# Altium PCB Mainboard.PcbDoc (part 1 of 2)
Units mm, origin at the board's own origin, x right, y up, seen from the top; angles counter-clockwise.
Board outline 80 x 116 mm, 4 copper layers (Top Layer, GND, VCC, Bottom Layer), stack 1.042 mm thick; 135 components, 105 nets, 477 pads, 1100 vias.
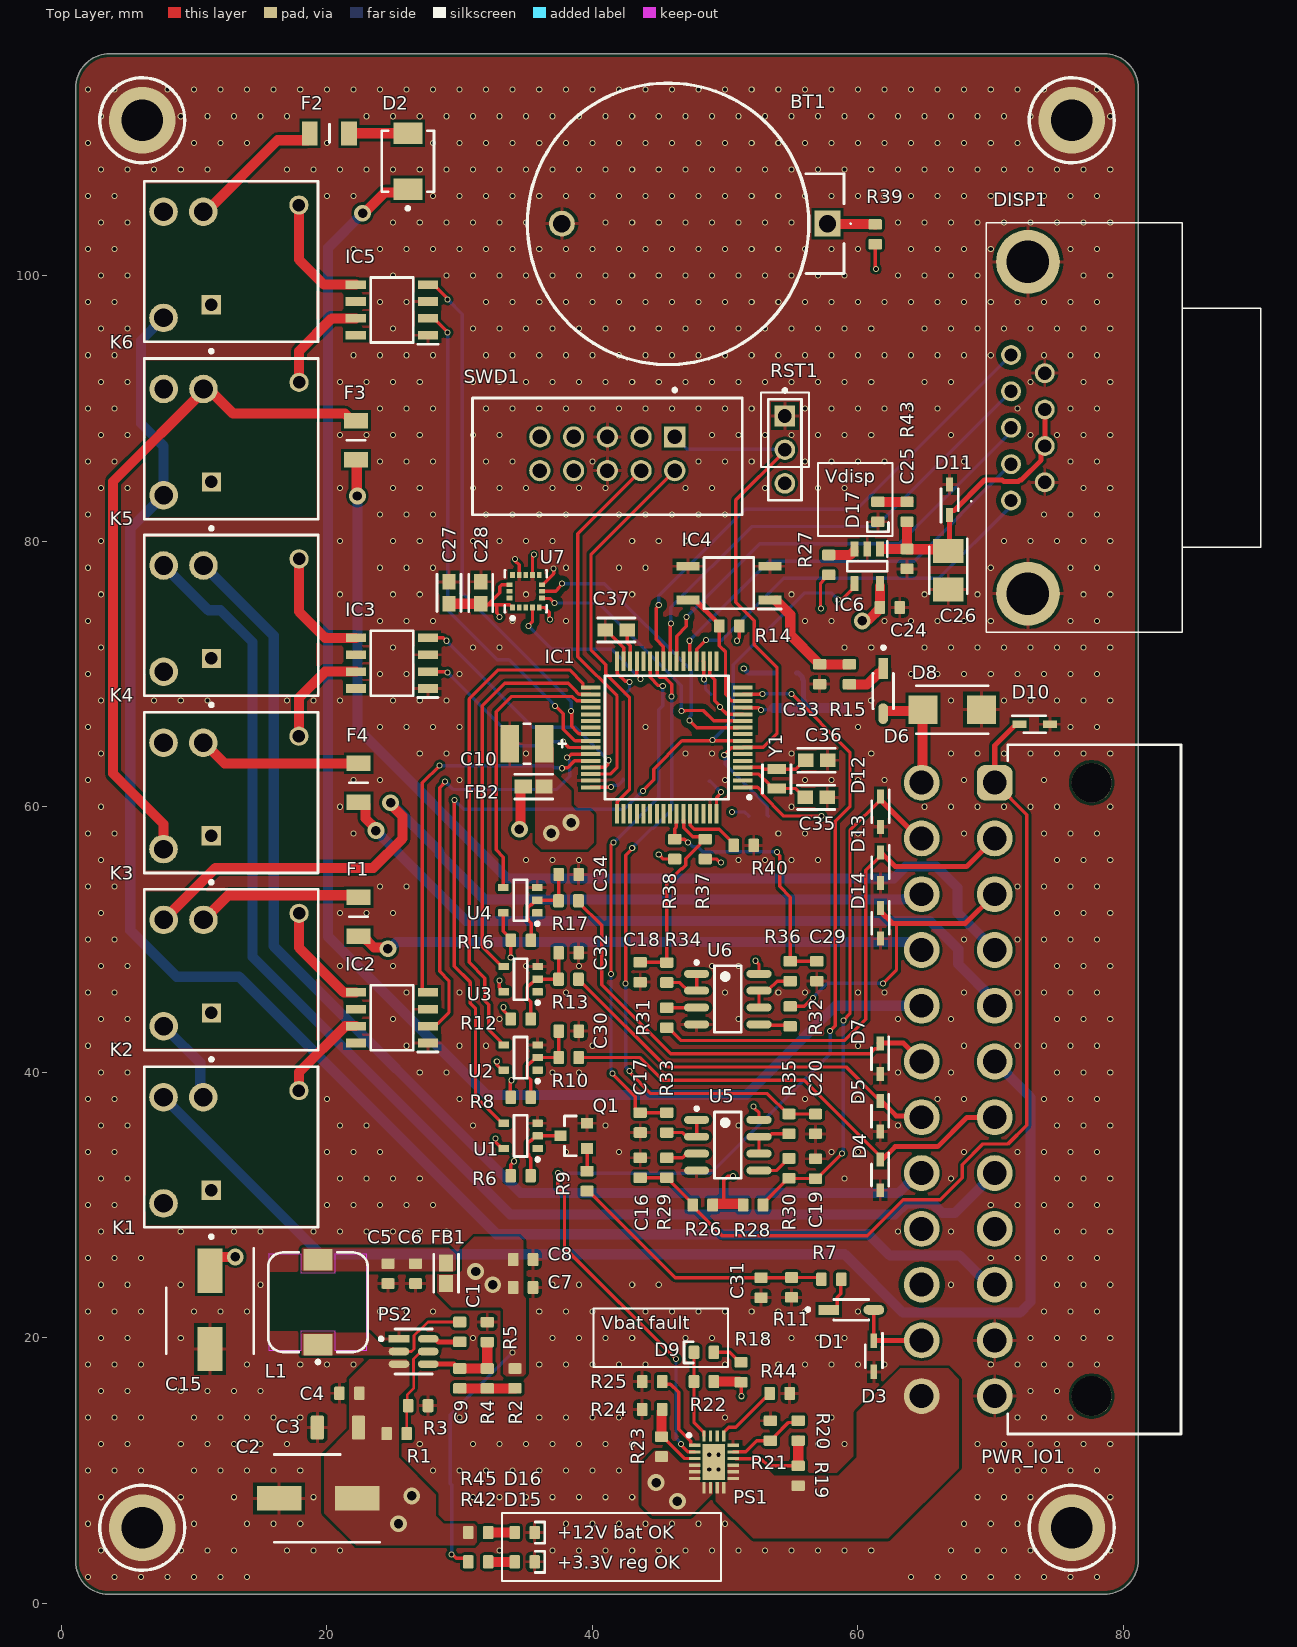
[diagram p0: Top Layer view]
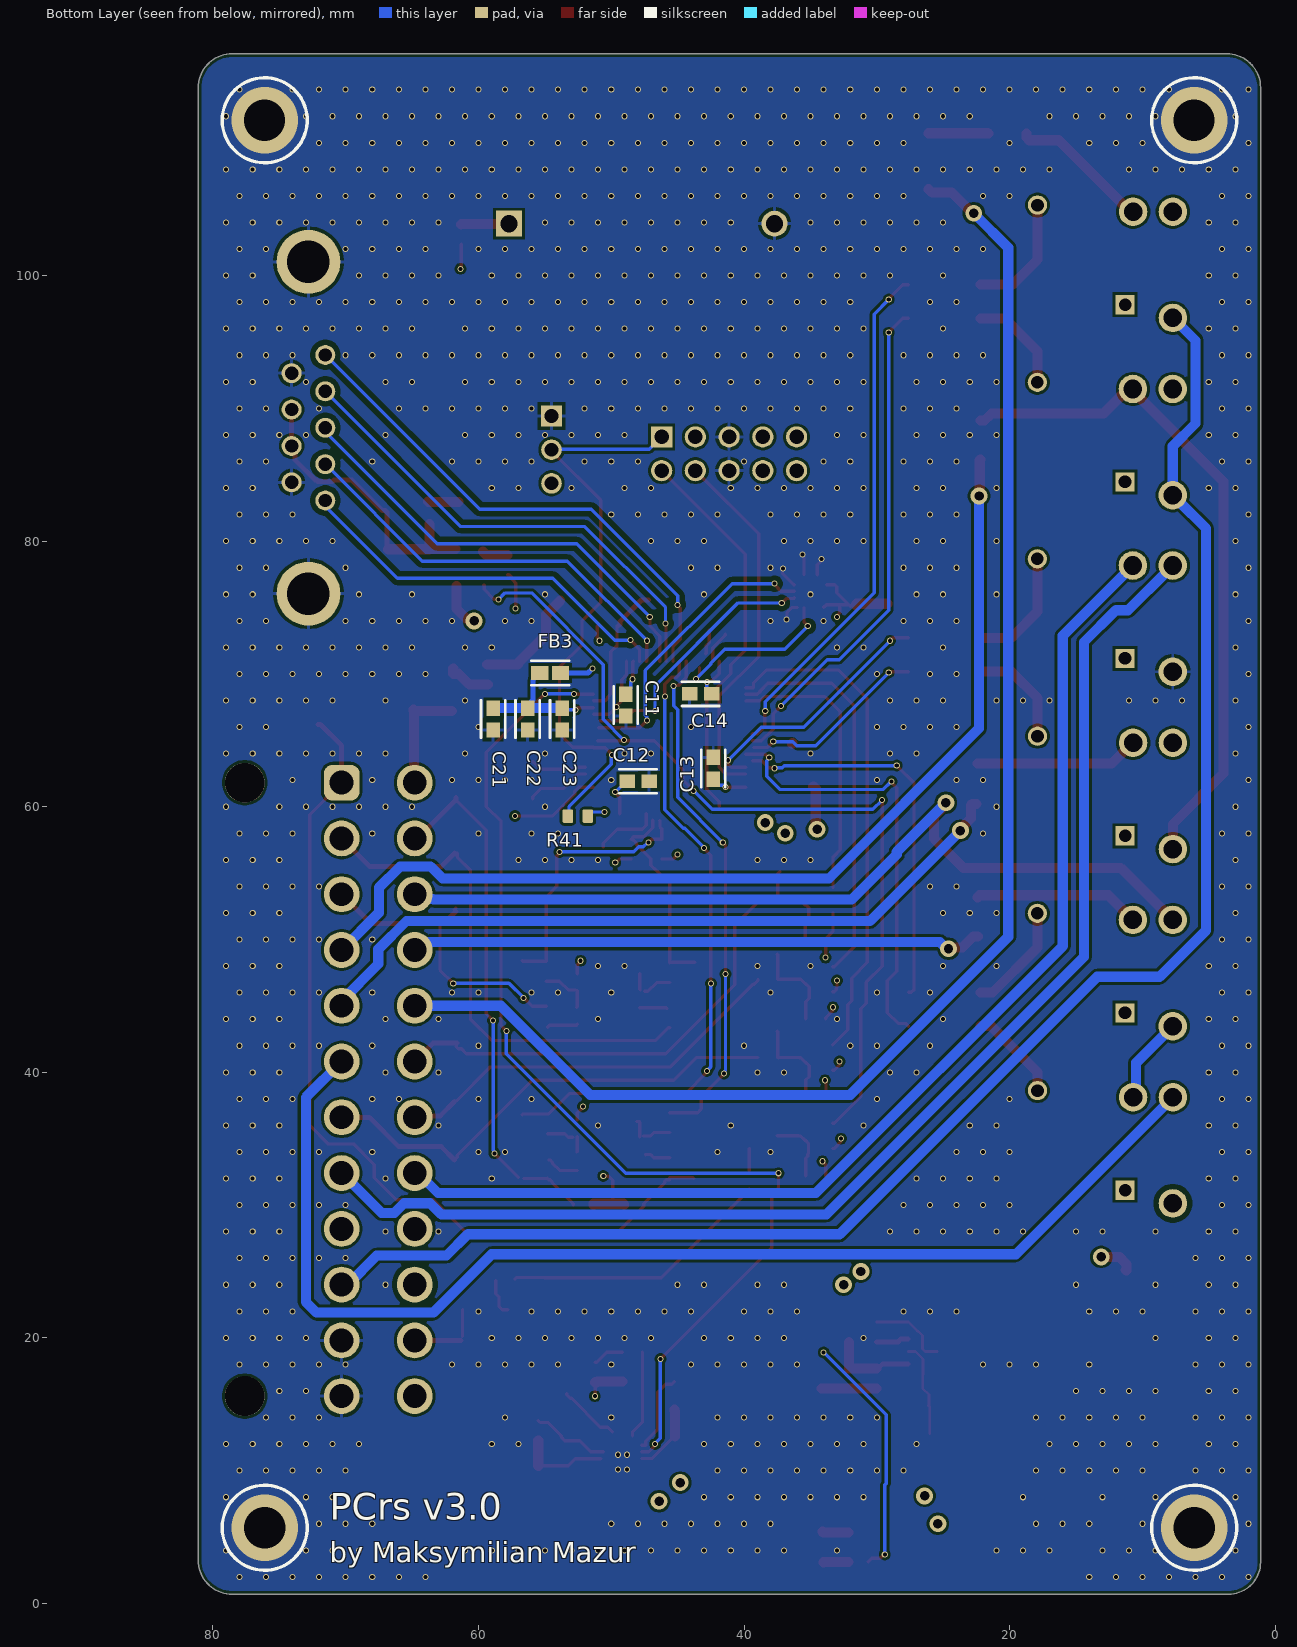
[diagram p1: Bottom Layer view, seen from below]
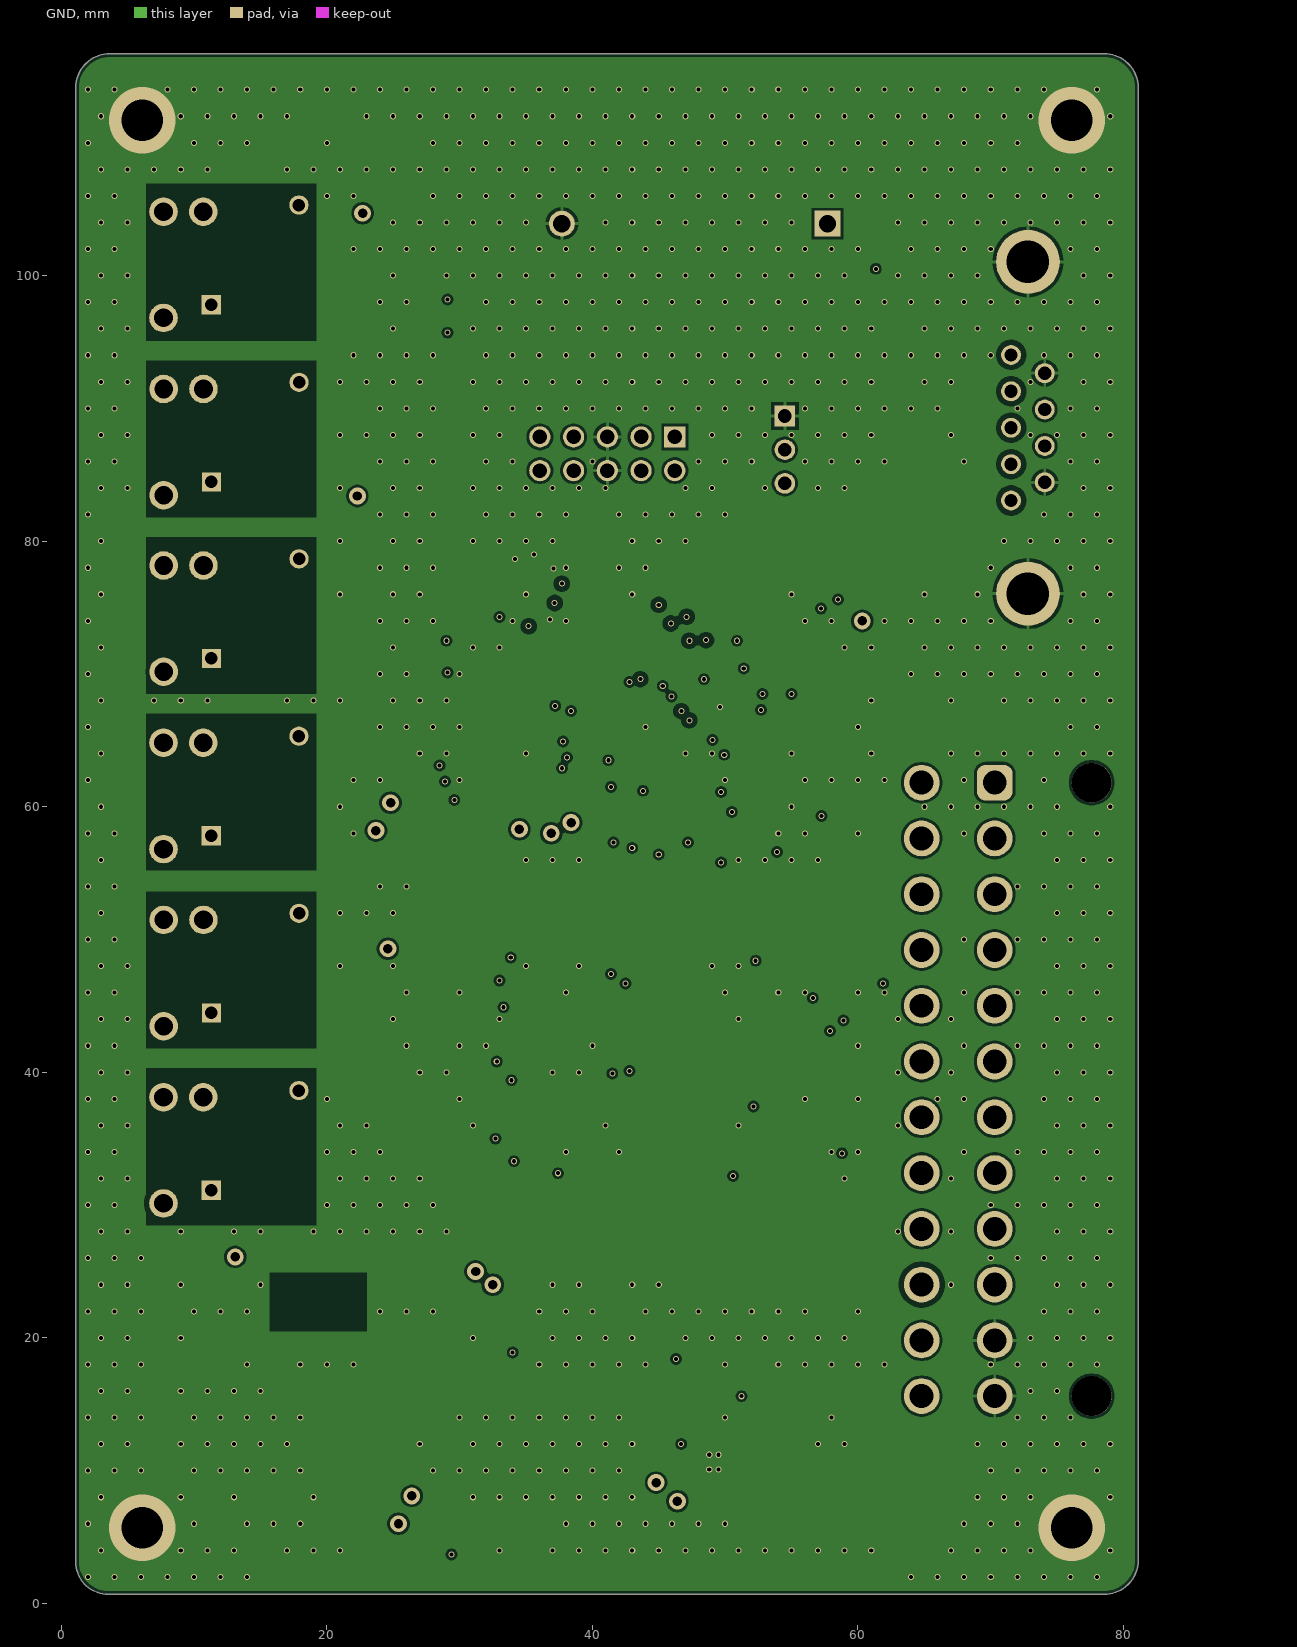
[diagram p2: GND]
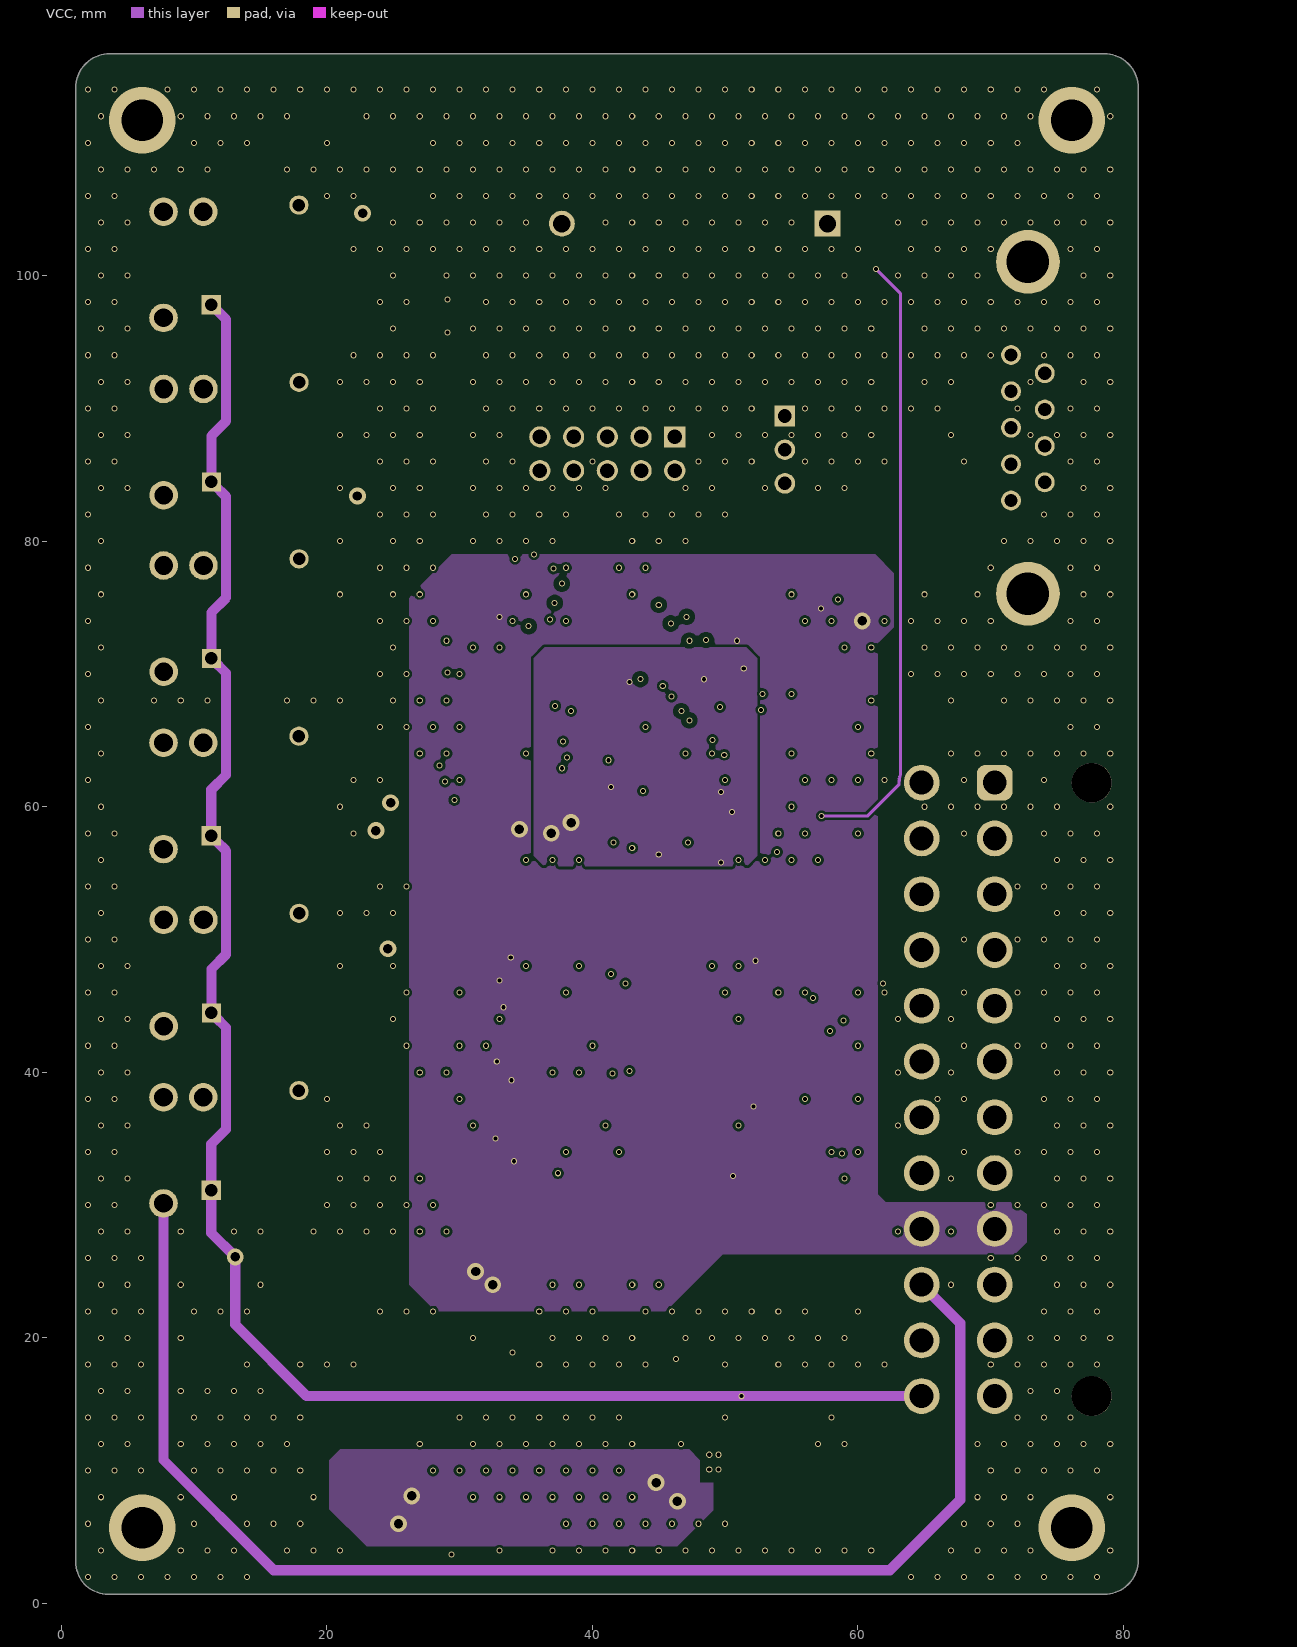
[diagram p3: VCC]
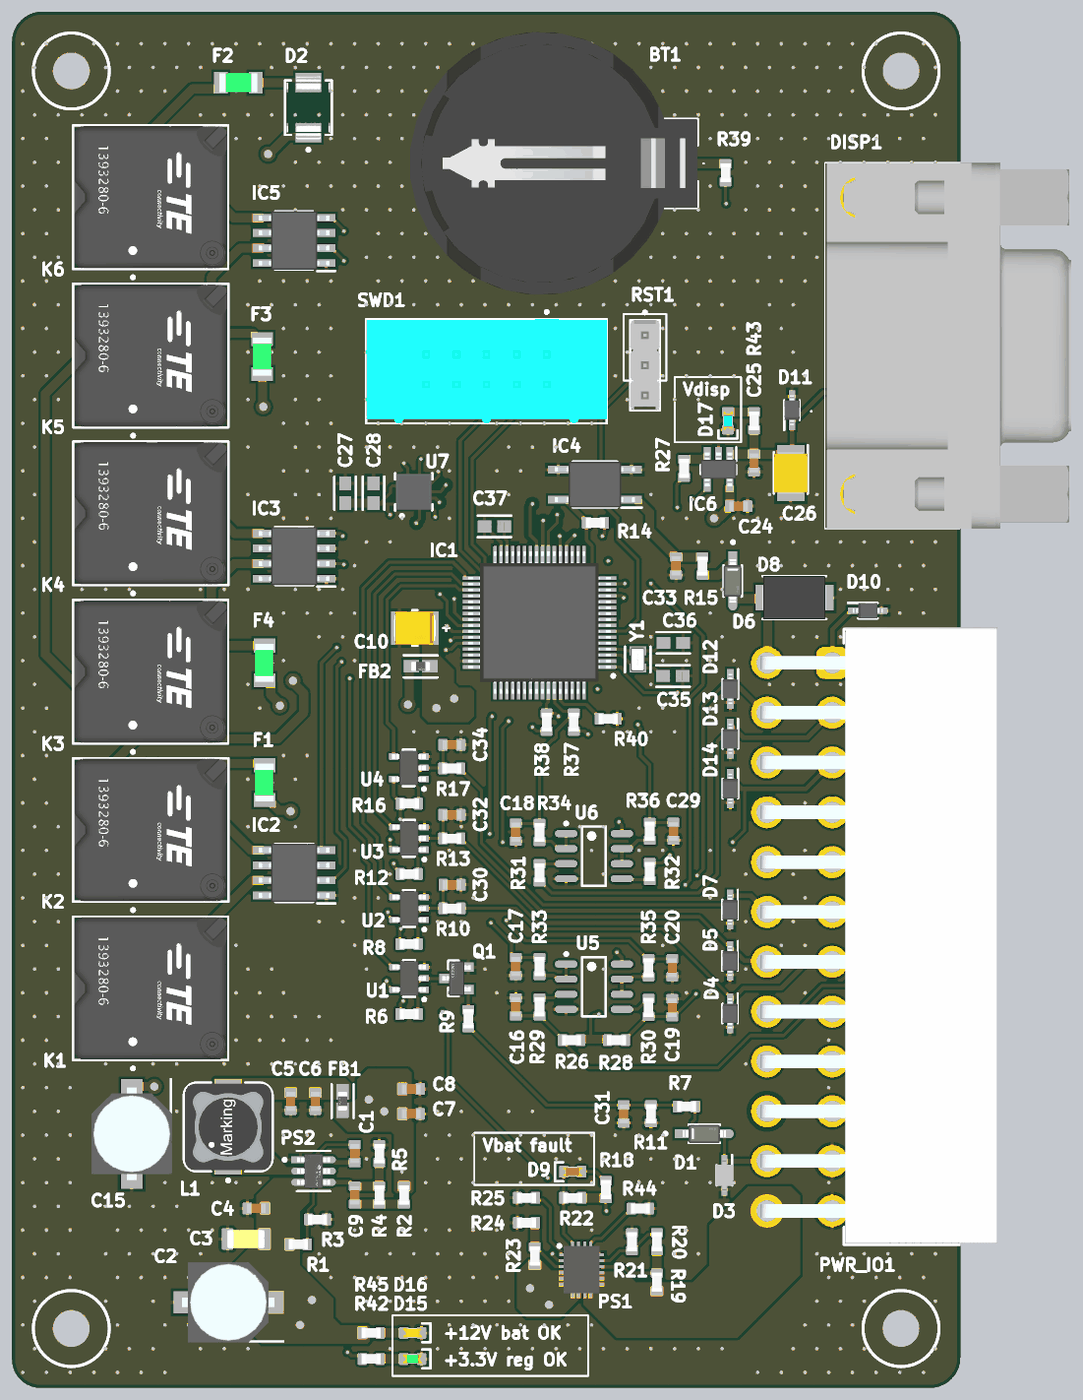
[diagram p5: 3D render of the assembled board from above, using the file's embedded part models]
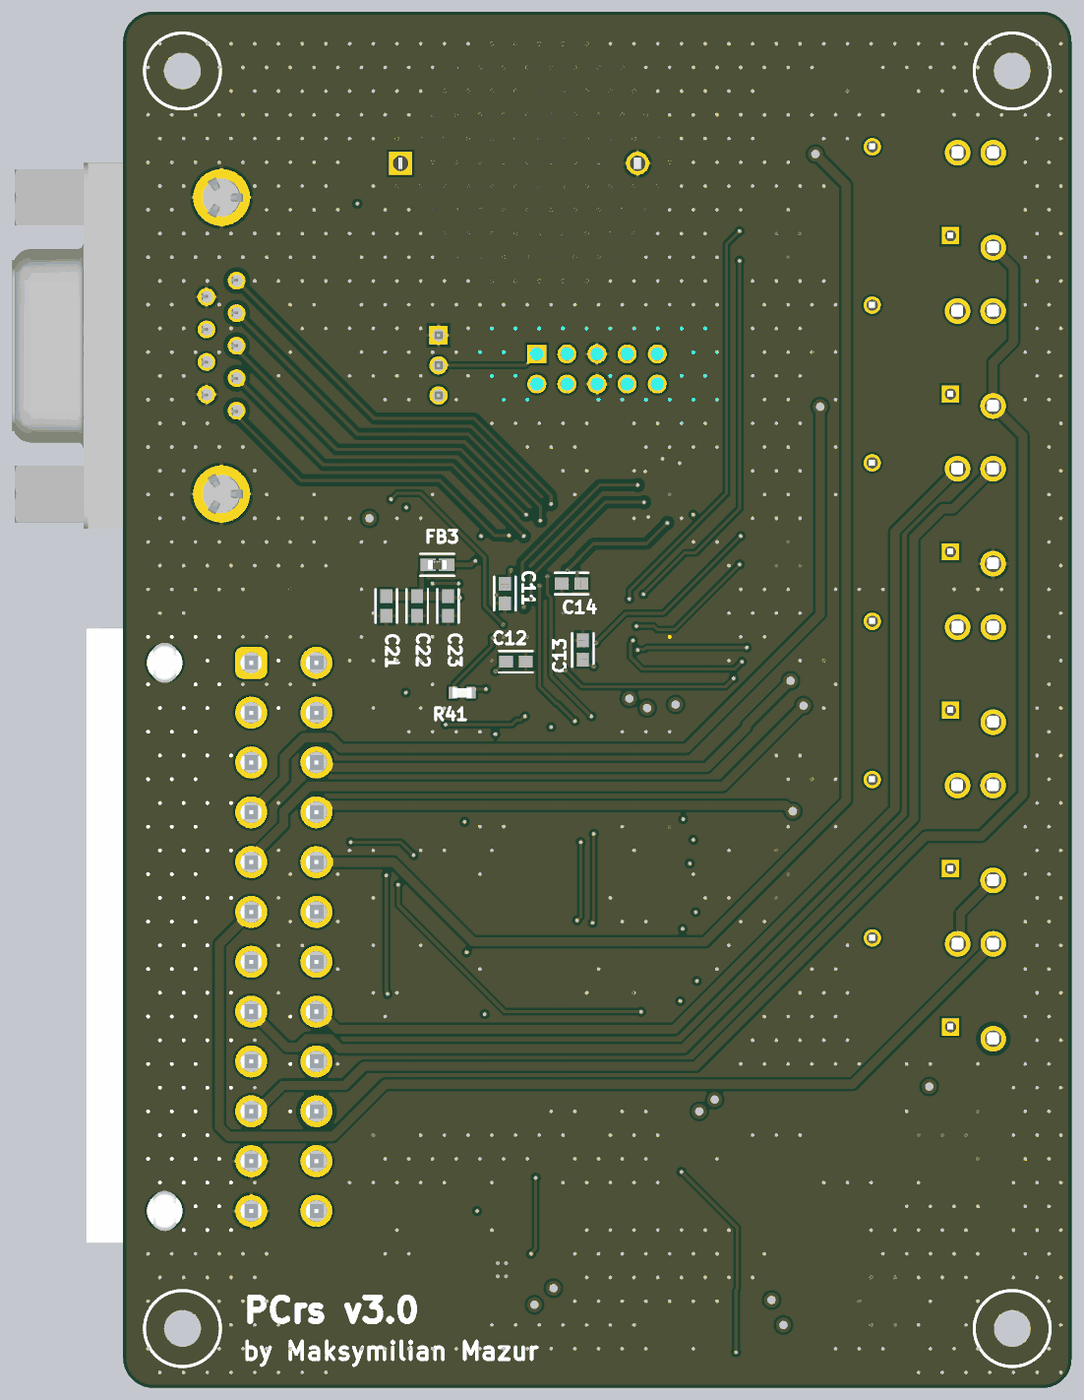
[diagram p6: 3D render of the assembled board from below, using the file's embedded part models]

## Layer stack, top to bottom
Top Solder: solder mask 0.0102, Solder Resist, Dk 3.5
Top Layer: signal copper 0.035
Prepreg Top: prepreg 0.108, PP-006, Dk 4.1
GND: signal copper 0.018
Core: dielectric 0.72, FR-4, Dk 4.8
VCC: signal copper 0.018
Prepreg Bottom: prepreg 0.108, PP-006, Dk 4.1
Bottom Layer: signal copper 0.035
Bottom Solder: solder mask 0.0102, Solder Resist, Dk 3.5

## Board outline
78.56,0.7 ccw(c78.56,3.24) 81.1,3.24 81.1,114.16 ccw(c78.56,114.16) 78.56,116.7 3.64,116.7 ccw(c3.64,114.16) 1.1,114.16 1.1,3.1 ccw(c3.5,3.1) 3.5,0.7 4.5,0.7

## Design rules (kind name [scope] priority, off if disabled: settings)
BoardOutlineClearance BoardOutlineClearance_con [InComponent('DISP1') OR InComponent('PWR_IO1')] p1: gap=0 ignorepadtopadclearanceinfootprint=FALSE
BoardOutlineClearance [All] p2: gap=0.254 ignorepadtopadclearanceinfootprint=FALSE except(0: Arc-SplitContinuation Track-SplitContinuation SMDPad-SplitContinuation THPad-SplitContinuation Via-SplitContinuation Fill-SplitContinuation Poly-SplitContinuation Region-SplitContinuation Text-SplitContinuation)
Clearance Clearance_fp_exceptions [InComponent('U7') OR InComponent('PS1')] p1: gap=0.2 ignorepadtopadclearanceinfootprint=FALSE except(0.1: Arc-SMDPad Track-SMDPad SMDPad-SMDPad)
Clearance Clearance_HF [InNetClass('HF_nets')] p2: gap=0.381 ignorepadtopadclearanceinfootprint=FALSE except(0.2: Track-Track Track-SMDPad SMDPad-SMDPad SMDPad-Fill SMDPad-Region)
Clearance Clearance_standard [All] p3: gap=0.2 ignorepadtopadclearanceinfootprint=FALSE
Clearance [All] p4: gap=0.254 ignorepadtopadclearanceinfootprint=FALSE
HoleSize [All] p1: absolutevalues=TRUE maxlimit=3.2 minlimit=0.2 maxpercent=80.000 minpercent=20.000
MinimumSolderMaskSliver MinimumSolderMaskSliver_fp_exceptions [InComponent('U7') OR InComponent('PS1')] p1: minsoldermaskwidth=0.05
MinimumSolderMaskSliver [All] p2: minsoldermaskwidth=0.1
PolygonConnect PolygonConnect_GND_VIA [InNet('VSS') vs IsVia] p1: connectstyle=Direct reliefconductorwidth=0.254 reliefentries=4 polygonreliefangle="90 Angle" airgapwidth=0.254
PolygonConnect PolygonConnect_GND [InNet('VSS') vs InNet('VSS')] p2: connectstyle=Relief reliefconductorwidth=0.254 reliefentries=4 polygonreliefangle="90 Angle" airgapwidth=0.254
PolygonConnect [All] p3: connectstyle=Direct reliefconductorwidth=0.254 reliefentries=4 polygonreliefangle="90 Angle" airgapwidth=0.254
RoutingVias RoutingVias_PWR [InNetClass('PWR')] p1: holewidth=0.3 width=0.6 viastyle="Through Hole" minholewidth=0.305 minwidth=0.457 maxholewidth=0.711 maxwidth=1.27
RoutingVias [All] p2: holewidth=0.305 width=0.457 viastyle="Through Hole" minholewidth=0.15 minwidth=0.25 maxholewidth=6.3 maxwidth=10
SilkToSilkClearance [All] p1: silktosilkclearance=0.15
SilkToSolderMaskClearance [IsPad] p1: minsilkscreentomaskgap=0.15 clearancetoexposedcopper=TRUE
SolderMaskExpansion [IsVia] p1: expansion=0.102 istentingtop=TRUE
SolderMaskExpansion SolderMaskExpansion_pads [All] p2: expansion=0.05 istentingtop=FALSE
SupplyNets "Schematic Supply Nets_6" [InNet('Vbat')] p1: voltage=0.000
SupplyNets "Schematic Supply Nets_5" [InNet('5V')] p2: voltage=0.000
SupplyNets "Schematic Supply Nets_4" [InNet('Vin')] p3: voltage=0.000
SupplyNets "Schematic Supply Nets_1" [InNet('USB5V')] p4: voltage=0.000
SupplyNets "Schematic Supply Nets" [InNet('3V3')] p5: voltage=0.000
SupplyNets "Schematic Supply Nets_2" [InNet('GND')] p6: voltage=0.000
Width [All] p1: maxlimit=0.762 minlimit=0.2 preferedwidth=0.381 midlayer1_minwidth=0.254 midlayer2_minwidth=0.254 minimp=50.000000 maximp=50.000000 favimp=50.000000
26 further rules are at their usual default settings.

## Classes and differential pairs
net class HF_nets: ACC_MISO ACC_MOSI ACC_SCK OLED_CS OLED_DC OLED_MOSI OLED_RST OLED_SCK VCC_rect_con
component class MPU: C10 C11 C12 C13 C14 C15 C21 C22 C23 C27 C28 C35 C36 C37 FB2 FB3 IC1 IC2 IC3 IC5 K1 K2 K3 K4 K5 K6 R37 R38 R39 R40 R41 Y1
component class Connectors: BT1 D2 D11 DISP1 F1 F2 F3 F4 RST1 SWD1
component class PowerSupply: C1 C2 C3 C4 C5 C6 C7 C8 C9 C24 C25 C26 D9 D15 D16 D17 FB1 IC6 L1 PS2 R1 R2 R3 R4 R5 R18 R19 R20 R21 R22 R23 R24 R25 R27 R42 R43 R44 R45
component class Buffers: C16 C17 C18 C19 C20 C29 C30 C31 C32 C33 C34 C? D1 D3 D4 D5 D6 D7 D8 D10 D12 D13 D14 IC4 Q1 R6 R7 R8 R9 R10 R11 R12 R13 R14 R15 R16 R17 R26 R28 R29 R30 R31 R32 R33 R34 R35 R36 U1 U2 U3 U4 U5 U6

## Components (designator, comment, footprint, x,y, rotation, side; value= is the part's Value field where it differs from the comment)
BT1 "BH-25F-1" BH25F1 57.7,103.912 r0 top
C1 "100nF" CAP_0603 30.016,20.446 r270 top
C2 "220uF" CAPAE660X810N 19.35,7.912 r180 top
C3 "10uF" CAP_1206 20.835,13.247 r0 top
C4 "1uF" CAP_0603 21.696,15.828 r0 top
C5 "22uF" CAP_0603 24.612,24.843 r90 top
C6 "22uF" CAP_0603 26.684,24.843 r90 top
C7 "22uF" CAP_0603 34.779,23.797 r180 top
C8 "22uF" CAP_0603 34.779,25.896 r180 top
C9 "75pF" CAP_0603 30.013,16.946 r270 top
C10 "100uF" FP-TAJB-MFG 35.076,64.742 r0 top
C11 "100nF" FP-CL10-IPC_A 48.9,67.658 r270 bottom
C12 "100nF" FP-CL10-IPC_A 47.973,61.912 r180 bottom
C13 "100nF" FP-CL10-IPC_A 42.318,62.891 r90 bottom
C14 "100nF" FP-CL10-IPC_A 43.267,68.494 r0 bottom
C15 "220uF" CAPAE660X810N 11.2,22.112 r270 top
C16 "22uF" CAP_0603 43.6,32.812 r90 top
C17 "220nF" CAP_0603 43.6,36.213 r270 top
C18 "220nF" CAP_0603 43.6,47.539 r270 top
C19 "22uF" CAP_0603 56.8,32.739 r90 top
C20 "220nF" CAP_0603 56.8,36.112 r270 top
C21 "10uF" FP-CL10-IPC_A 58.9,66.603 r270 bottom
C22 "1uF" FP-CL10-IPC_A 56.3,66.603 r270 bottom
C23 "100nF" FP-CL10-IPC_A 53.7,66.603 r270 bottom
C24 "1uF" CAP_0603 62.4,75.012 r180 top
C25 "100nF" CAP_0603 63.7,78.662 r90 top
C26 "100uF" CAPPM3528X210N 66.8,77.812 r270 top
C27 "10uF" FP-CL10-IPC_A 29.2,76.112 r90 top
C28 "100nF" FP-CL10-IPC_A 31.6,76.112 r90 top
C29 "220nF" CAP_0603 56.9,47.613 r270 top
C30 "220nF" CAP_0603 38.228,43.101 r0 top
C31 "220nF" CAP_0603 52.7,23.785 r270 top
C32 "220nF" CAP_0603 38.212,49 r0 top
C33 "1nF" CAP_0603 57.115,69.985 r270 top
C34 "220nF" CAP_0603 38.212,54.9 r0 top
C35 "22pF" FP-CL10-IPC_A 56.859,60.7 r180 top
C36 "22pF" FP-CL10-IPC_A 56.886,63.5 r180 top
C37 "2.2uF" FP-CL10-IPC_A 41.8,73.312 r0 top
D1 "1N5819HW-7-F" FP-SOD123-IPC_A 59.5,22.113 r0 top
D2 "STTH4R02U" FP-SMB-MFG 26.101,108.612 r90 top
D3 "STS321150U332" SOD2613X100N 61.2,18.612 r270 top
D4 "SD05.TCT" SOD2513X110N 61.675,32.267 r270 top
D5 "SD05.TCT" SOD2513X110N 61.675,36.685 r270 top
D6 "1N5819HW-7-F" FP-SOD123-IPC_A 61.9,68.712 r270 top
D7 "SD05.TCT" SOD2513X110N 61.675,41.012 r270 top
D8 "P6SMB15CA" DIONM5436X261N 67.1,67.312 r180 top
D9 "OSR50603C1E-VV" LED_0603_RED 48.4,18.912 r0 top
D10 "SD05.TCT" SOD2513X110N 73.3,66.212 r0 top
D11 "SD05.TCT" SOD2513X110N 66.9,83.112 r90 top
D12 "SD05.TCT" SOD2513X110N 61.7,59.613 r270 top
D13 "SD05.TCT" SOD2513X110N 61.7,55.413 r270 top
D14 "SD05.TCT" SOD2513X110N 61.7,51.212 r270 top
D15 "OSG50603C1E" LED_0603_GREEN 34.9,3.136 r180 top
D16 "OSY50603C1E-VV" LED_0603_YELLOW 34.9,5.336 r180 top
D17 "OSB50603C1E" LED_0603_BLUE 61.5,82.212 r90 top
DISP1 "L77SDE09S1ACH4F" L77SDE09S1ACH4F 71.53,83.062 r90 top
F1 "0685T5000-01" FUSC3216X83N 22.4,51.712 r90 top
F2 "0685T3000-01" FUSC3216X83N 20.2,110.712 r180 top
F3 "0685T5000-01" FUSC3216X83N 22.2,87.612 r270 top
F4 "0685T5000-01" FUSC3216X83N 22.4,61.798 r270 top
FB1 "test" FP-BLM18-0_15-t0_8-IPC_A 28.989,24.866 r270 top
FB2 "3V3_VDD_FB" FP-BLM18-0_15-t0_8-IPC_A 35.576,61.512 r0 top
FB3 "3V3_VDDA_FB" FP-BLM18-0_15-t0_8-IPC_A 54.6,70.073 r0 bottom
IC1 "STM32F446RET6" QFP50P1200X1200X160-64N 45.6,65.212 r180 top
IC2 "ZXMS6004DN8-13" SOIC127P600X175-8N 24.901,44.112 r180 top
IC3 "ZXMS6004DN8-13" SOIC127P600X175-8N 24.901,70.812 r180 top
IC4 "LTV-356T" SOP254P675X220-4N 50.275,76.842 r180 top
IC5 "ZXMS6004DN8-13" SOIC127P600X175-8N 24.9,97.412 r180 top
IC6 "AP22802BW5-7" SOT95P285X140-5N 60.7,78.113 r270 top
K1 "1393280-6" FP-1393280-6-MFG 12.79,34.374 r90 top
K2 "1393280-6" FP-1393280-6-MFG 12.801,47.724 r90 top
K3 "1393280-6" FP-1393280-6-MFG 12.79,61.062 r90 top
K4 "1393280-6" FP-1393280-6-MFG 12.8,74.419 r90 top
K5 "1393280-6" FP-1393280-6-MFG 12.8,87.712 r90 top
K6 "1393280-6" FP-1393280-6-MFG 12.79,101.062 r90 top
L1 "pwr_inductor" WE-PD_7345 19.332,22.686 r90 top
PS1 "TPS25942ARVCT" QFN50P300X400X80-21N 49.15,10.662 r0 top
PS2 "TPS54202DDCR" FP-DDC0006A-IPC_B 26.538,18.974 r0 top
PWR_IO1 "I/O" 649024227222 77.8,38.712 r90 top
Q1 "2N7002-7-F" FP-SOT23-MFG 38.601,35.212 r180 top
R1 "511k" RES_0603 25.259,12.796 r180 top
R2 "49.9R" RES_0603 34.17,16.946 r90 top
R3 "105k" RES_0603 26.872,14.896 r180 top
R4 "100k" RES_0603 32.084,16.946 r270 top
R5 "22k" RES_0603 32.084,20.433 r90 top
R6 "10k" RES_0603 34.6,32.212 r0 top
R7 "220k" RES_0603 58,24.412 r0 top
R8 "10k" RES_0603 34.6,38.112 r0 top
R9 "100k" RES_0603 39.6,31.813 r270 top
R10 "100k" RES_0603 38.216,41.112 r0 top
R11 "150k" RES_0603 55,23.797 r270 top
R12 "10k" RES_0603 34.6,44.012 r0 top
R13 "100k" RES_0603 38.2,47.012 r0 top
R14 "10k" RES_0603 50.316,73.612 r180 top
R15 "2.7k" RES_0603 59.351,69.973 r270 top
R16 "10k" RES_0603 34.616,49.943 r0 top
R17 "100k" RES_0603 38.2,52.912 r0 top
R18 "100R" RES_0603 51.2,17.413 r270 top
R19 "511k" RES_0603 55.5,9.613 r270 top
R20 "22k" RES_0603 55.501,13.012 r270 top
R21 "33k" RES_0603 53.4,13.013 r270 top
R22 "10k" RES_0603 48.4,16.713 r0 top
R23 "511k" RES_0603 45.201,11.812 r270 top
R24 "46.4k" RES_0603 44.5,14.613 r0 top
R25 "10k" RES_0603 44.5,16.713 r0 top
R26 "10k" RES_0603 48.3,30.012 r0 top
R27 "10k" RES_0603 57.801,78.212 r270 top
R28 "10k" RES_0603 52.1,30.012 r180 top
R29 "100R" RES_0603 45.601,32.812 r270 top
R30 "100R" RES_0603 54.8,32.762 r270 top
R31 "100R" RES_0603 45.6,44.113 r270 top
R32 "100R" RES_0603 54.9,44.212 r90 top
R33 "10k" RES_0603 45.601,36.212 r270 top
R34 "1k" RES_0603 45.601,47.512 r270 top
R35 "10k" RES_0603 54.801,36.112 r270 top
R36 "1k" RES_0603 54.901,47.612 r270 top
R37 "4.7k" RES_0603 48.5,56.812 r90 top
R38 "4.7k" RES_0603 46.2,56.812 r90 top
R39 "100R" RES_0603 61.301,103.112 r270 top
R40 "10k" RES_0603 51.4,57.092 r180 top
R41 "10k" RES_0603 52.515,59.288 r0 bottom
R42 "1k" RES_0603 31.4,3.135 r180 top
R43 "1k" RES_0603 63.701,82.212 r270 top
R44 "150k" RES_0603 54.1,15.813 r0 top
R45 "100R" RES_0603 31.4,5.335 r180 top
RST1 "rst" MOLX-22-28-4033_V 54.5,86.888 r270 top
SWD1 "30310-6002HB" 3M-30310-6002HB-10_V 41.125,86.582 r180 top
U1 "SN74LVC1G17DBVR" DBV0005A_L 34.6,35.212 r180 top
U2 "SN74LVC1G17DBVR" DBV0005A_L 34.601,41.112 r180 top
U3 "SN74LVC1G17DBVR" DBV0005A_L 34.601,47.012 r180 top
U4 "SN74LVC1G17DBVR" DBV0005A_L 34.575,52.962 r180 top
U5 "AD8532ARZ" ADI-R-8_L 50.2,34.512 r0 top
U6 "AD8532ARZ" ADI-R-8_L 50.2,45.512 r0 top
U7 "LIS3DHTR" FP-LGA-16-7983231-MFG 34.988,76.225 r90 top
Y1 "ABS06-32.768KHZ-T" FP-ABS06-MFG 53.888,62.1 r90 top

## Footprints (in the part's own frame and the unit in brackets; to place one, negate y for a bottom-side part, rotate by r counter-clockwise, add the part's x,y. Pads: shape width x height; smd on the part's side, far side on the other; paste and mask are expansions set on the pad)
3M-30310-6002HB-10_V [mm] "CONN, 10-Leads, Body 20.3x8.4mm, Pitch 2.54mm"
  rect 1.6x1.6 hole 1.09: 1(-5.08,-1.27)
  round 1.6 hole 1.09: 2(-5.08,1.27) 3(-2.54,-1.27) 4(-2.54,1.27) 5(0,-1.27) 6(0,1.27) 7(2.54,-1.27) 8(2.54,1.27) 9(5.08,-1.27) 10(5.08,1.27)
  silkscreen extent -10.15,-4.92 10.15,4.58, body extent -10.15,-4.2 10.15,4.61, height 8.89
649024227222 [mm] "4.20mm Male Dual Row Angled Header with Mounting Pegs, 24p"
  rrect50% 2.7x2.7 hole 1.8: 1(23.1,7.5)
  round 2.7 hole 1.8: 2(18.9,7.5) 3(14.7,7.5) 4(10.5,7.5) 5(6.3,7.5) 6(2.1,7.5) 7(-2.1,7.5) 8(-6.3,7.5) 9(-10.5,7.5) 10(-14.7,7.5) 11(-18.9,7.5) 12(-23.1,7.5) 13(23.1,13) 14(18.9,13) 15(14.7,13) 16(10.5,13) 17(6.3,13) 18(2.1,13) 19(-2.1,13) 20(-6.3,13) 21(-10.5,13) 22(-14.7,13) 23(-18.9,13) 24(-23.1,13)
  round 3 hole 3 unplated: MH1(-23.1,0.2) MH2(23.1,0.2)
  silkscreen extent -25.95,-6.53 25.95,6.53, body extent -25.8,-6.4 26.1,13.57, height 11.43
ADI-R-8_L [mm] "SOIC, 8-Leads, Body 4.9x3.9mm, Pitch 1.27mm, IPC High Density"
  oval 1.9x0.6 smd: 1(-2.35,1.905) 2(-2.35,0.635) 3(-2.35,-0.635) 4(-2.35,-1.905) 5(2.35,-1.905) 6(2.35,-0.635) 7(2.35,0.635) 8(2.35,1.905)
  silkscreen extent -2.47,-2.5 1,2.88, body extent -2,-2.5 2,2.5, height 1.75
BH25F1 [mm]
  rect 1.95x1.95 hole 1.3: 1(0,0)
  round 1.95 hole 1.3: 2(-20,0)
  silkscreen extent -1.61,-3.75 1.8,3.75, body extent -23.07,-11.08 1.21,11.08, height 9
CAP_0603 [mm]
  rrect25% 0.8x1 smd: 1(-0.75,0) 2(0.75,0)
  body extent -0.8,-0.4 0.8,0.4, height 0.51
CAP_1206 [mm]
  rrect25% 1x1.8 smd: 1(-1.55,0) 2(1.55,0)
  body extent -1.6,-0.8 1.6,0.8, height 0.94
CAPAE660X810N [mm]
  rect 3.35x1.85 smd: 1(-2.95,0) 2(2.95,0)
  silkscreen extent -4.62,-3.3 3.3,3.3, body extent -3.9,-3.4 3.9,3.4, height 8.1
CAPPM3528X210N [mm]
  rect 1.8x2.3 smd: 1(-1.45,0) 2(1.45,0)
  silkscreen extent -2.35,-1.43 1.75,1.43, body extent -1.75,-1.43 1.75,1.43, height 2.1
DBV0005A_L [mm] "SOT23, 5-Leads, Body 3.05x1.75mm, Pitch 0.95mm, IPC High Density"
  rrect18% 0.8x0.55 smd: 1(-1.275,0.95) 2(-1.275,0) 3(-1.275,-0.95) 4(1.275,-0.95) 5(1.275,0.95)
  silkscreen extent -1.4,-1.55 0.5,1.9, body extent -1.42,-1.46 1.42,1.46, height 1.08
DIONM5436X261N [mm]
  rect 2.2x2.15 smd: 1(-2.2,0) 2(2.2,0)
  silkscreen extent -2.7,-1.81 2.7,1.81, body extent -2.7,-1.81 2.7,1.81, height 2.61
FP-1393280-6-MFG [mm]
  rect 1.45x1.45 hole 0.95 paste-2539.97 mask+0: 1(-3.25,1.49)
  round 1.45 hole 0.95 paste-2539.97 mask+0: 2(4.25,-5.11)
  round 2.15 hole 1.4 paste-2539.97 mask+0: 3(3.75,5.09) 4(-4.25,5.09) 5(3.75,2.09)
  silkscreen extent -6.87,-6.55 6.05,6.55, body extent -6.15,-6.65 6.15,6.65, height 0.25
FP-ABS06-MFG [mm]
  rect 0.75x1.4 smd paste+0 mask+0: 1(-0.725,0) 2(0.725,0)
  silkscreen extent -1.07,-1.07 1.07,1.07, body extent -1.2,-0.8 1.2,0.8, height 0.25
FP-BLM18-0_15-t0_8-IPC_A [mm]
  rect 1.306x1.058 smd paste+0 mask+0: 1(-0.776,0) 2(0.776,0)
  silkscreen extent -1.43,-0.93 1.43,0.93, body extent -1.93,-1.03 1.93,1.03, height 0.25
FP-CL10-IPC_A [mm]
  rect 1.158x1.012 smd paste+0 mask+0: 1(-0.827,0) 2(0.827,0)
  silkscreen extent -1.41,-0.91 1.41,0.91, body extent -0.8,-0.4 0.8,0.4, height 0.9
FP-DDC0006A-IPC_B [mm]
  rect 1.554x0.572 smd paste+0 mask+0: 1(-1.1,0.95)
  rrect100% 1.554x0.572 smd paste+0 mask+0: 2(-1.1,0) 3(-1.1,-0.95) 4(1.1,-0.95) 5(1.1,0) 6(1.1,0.95)
  silkscreen extent -2.57,-1.7 1.4,1.7, body extent -2.13,-1.7 2.13,1.7, height 0.25
FP-LGA-16-7983231-MFG [mm]
  rect 0.45x0.35 smd paste-1000 mask+0: 1(-1.225,1) 2(-1.225,0.5) 3(-1.225,0) 4(-1.225,-0.5) 5(-1.225,-1) 9(1.225,-1) 10(1.225,-0.5) 11(1.225,0) 12(1.225,0.5) 13(1.225,1)
  rect 0.35x0.45 smd paste-1000 mask+0: 6(-0.5,-1.225) 7(0,-1.225) 8(0.5,-1.225) 14(0.5,1.225) 15(0,1.225) 16(-0.5,1.225)
  silkscreen extent -2.15,-1.58 1.58,1.58, body extent -2.07,-2.07 2.07,2.07, height 0.25
FP-SMB-MFG [mm]
  rect 1.62x2.18 smd paste+0 mask+0: 1(-2.11,0) 2(2.11,0)
  silkscreen extent -3.67,-1.97 2.3,1.97, body extent -3.02,-2.07 3.02,2.07, height 0.25
FP-SOD123-IPC_A [mm]
  rect 1.557x0.742 smd paste+0 mask+0: 1(-1.7,0)
  rrect100% 1.557x0.742 smd paste+0 mask+0: 2(1.7,0)
  silkscreen extent -3.39,-0.77 1.33,0.77, body extent -2.98,-1.28 2.98,1.28, height 0.25
FP-SOT23-MFG [mm]
  rect 0.9x0.8 smd paste+0 mask+0: 1(-1,0.95) 2(-1,-0.95) 3(1,0)
  silkscreen extent -0.18,-1.5 0.7,1.5, body extent -1.55,-1.6 1.55,1.6, height 0.25
FP-TAJB-MFG [mm]
  rect 1.4x2.8 smd paste+0 mask+0: 1(-1.3,0) 2(1.3,0)
  silkscreen extent -0.23,-1.5 2.9,1.5, body extent -2.1,-1.6 2.1,1.6, height 0.25
FUSC3216X83N [mm]
  rect 1.17x1.8 smd: 1(-1.47,0) 2(1.47,0)
  silkscreen extent 0,-0.69 0,0.69, body extent -1.6,-0.79 1.6,0.79, height 0.83
L77SDE09S1ACH4F [mm]
  round 1.5 hole 1: 1(0,0) 2(2.74,0) 3(5.48,0) 4(8.22,0) 5(10.96,0) 6(1.37,-2.54) 7(4.11,-2.54) 8(6.85,-2.54) 9(9.59,-2.54)
  round 4.8 hole 3.2: MH1(-7.015,-1.27) MH2(17.975,-1.27)
  silkscreen extent -9.94,-18.79 20.9,3.05, body extent -9.93,-18.92 20.89,1.68, height 13.6
LED_0603_BLUE [mm]
  rrect25% 0.8x1 smd: A(0.75,0) K(-0.75,0)
  silkscreen extent -1.5,-0.8 -0.8,0.8, body extent -0.8,-0.4 0.8,0.4, height 0.6
LED_0603_GREEN [mm]
  rrect25% 0.8x1 smd: A(0.75,0) K(-0.75,0)
  silkscreen extent -1.5,-0.8 -0.8,0.8, body extent -0.8,-0.4 0.8,0.4, height 0.6
LED_0603_RED [mm]
  rrect25% 0.8x1 smd: A(0.75,0) K(-0.75,0)
  silkscreen extent -1.5,-0.8 -0.8,0.8, body extent -0.8,-0.4 0.8,0.4, height 0.6
LED_0603_YELLOW [mm]
  rrect25% 0.8x1 smd: A(0.75,0) K(-0.75,0)
  silkscreen extent -1.5,-0.8 -0.8,0.8, body extent -0.8,-0.4 0.8,0.4, height 0.6
MOLX-22-28-4033_V [mm] "THD, 3-Leads, Body 7.62x2.49mm, Pitch 2.54mm"
  rect 1.55x1.55 hole 1.02: 1(-2.54,0)
  round 1.55 hole 1.02: 2(0,0) 3(2.54,0)
  silkscreen extent -4.58,-1.24 3.81,1.24, body extent -3.81,-1.24 3.81,1.24, height 8.38
QFN50P300X400X80-21N [mm]
  rect 0.85x0.25 smd: 1(-1.45,1.25) 2(-1.45,0.75) 3(-1.45,0.25) 4(-1.45,-0.25) 5(-1.45,-0.75) 6(-1.45,-1.25) 11(1.45,-1.25) 12(1.45,-0.75) 13(1.45,-0.25) 14(1.45,0.25) 15(1.45,0.75) 16(1.45,1.25)
  rect 0.25x0.85 smd: 7(-0.75,-1.95) 8(-0.25,-1.95) 9(0.25,-1.95) 10(0.75,-1.95) 17(0.75,1.95) 18(0.25,1.95) 19(-0.25,1.95) 20(-0.75,1.95)
  rect 1.7x2.7 smd: 21(0,0)
  silkscreen extent -2,1.88 -1.75,2.12, body extent -1.5,-2 1.5,2, height 0.8
QFP50P1200X1200X160-64N [mm]
  rect 1.475x0.3 smd: 1(-5.738,3.75) 2(-5.738,3.25) 3(-5.738,2.75) 4(-5.738,2.25) 5(-5.738,1.75) 6(-5.738,1.25) 7(-5.738,0.75) 8(-5.738,0.25) 9(-5.738,-0.25) 10(-5.738,-0.75) 11(-5.738,-1.25) 12(-5.738,-1.75) 13(-5.738,-2.25) 14(-5.738,-2.75) 15(-5.738,-3.25) 16(-5.738,-3.75) 33(5.738,-3.75) 34(5.738,-3.25) 35(5.738,-2.75) 36(5.738,-2.25) 37(5.738,-1.75) 38(5.738,-1.25) 39(5.738,-0.75) 40(5.738,-0.25) 41(5.738,0.25) 42(5.738,0.75) 43(5.738,1.25) 44(5.738,1.75) 45(5.738,2.25) 46(5.738,2.75) 47(5.738,3.25) 48(5.738,3.75)
  rect 0.3x1.475 smd: 17(-3.75,-5.738) 18(-3.25,-5.738) 19(-2.75,-5.738) 20(-2.25,-5.738) 21(-1.75,-5.738) 22(-1.25,-5.738) 23(-0.75,-5.738) 24(-0.25,-5.738) 25(0.25,-5.738) 26(0.75,-5.738) 27(1.25,-5.738) 28(1.75,-5.738) 29(2.25,-5.738) 30(2.75,-5.738) 31(3.25,-5.738) 32(3.75,-5.738) 49(3.75,5.738) 50(3.25,5.738) 51(2.75,5.738) 52(2.25,5.738) 53(1.75,5.738) 54(1.25,5.738) 55(0.75,5.738) 56(0.25,5.738) 57(-0.25,5.738) 58(-0.75,5.738) 59(-1.25,5.738) 60(-1.75,5.738) 61(-2.25,5.738) 62(-2.75,5.738) 63(-3.25,5.738) 64(-3.75,5.738)
  silkscreen extent -6.35,-4.65 4.65,4.65, body extent -6,-6 6,6, height 1.6
RES_0603 [mm]
  rrect25% 0.8x1 smd: 1(-0.75,0) 2(0.75,0)
  body extent -0.8,-0.43 0.8,0.43, height 0.52
SOD2513X110N [mm]
  rect 1.05x0.55 smd: 1(-1.15,0) 2(1.15,0)
  silkscreen extent -1.68,-0.65 0.82,0.65, body extent -1.25,-0.65 1.25,0.65, height 1.1
SOD2613X100N [mm]
  rect 1.1x0.5 smd: 1(-1.175,0) 2(1.175,0)
  silkscreen extent -1.73,-0.65 0.85,0.65, body extent -1.38,-0.7 1.38,0.7, height 1.11
SOIC127P600X175-8N [mm]
  rect 1.525x0.65 smd: 1(-2.712,1.905) 2(-2.712,0.635) 3(-2.712,-0.635) 4(-2.712,-1.905) 5(2.712,-1.905) 6(2.712,-0.635) 7(2.712,0.635) 8(2.712,1.905)
  silkscreen extent -3.47,-2.45 1.6,2.58, body extent -3,-2.45 3,2.45, height 1.75
SOP254P675X220-4N [mm]
  rect 1.725x0.65 smd: 1(-3.088,1.27) 2(-3.088,-1.27) 3(3.088,-1.27) 4(3.088,1.27)
  silkscreen extent -3.95,-1.92 1.88,1.94, body extent -3.37,-1.92 3.37,1.92, height 2.2
SOT95P285X140-5N [mm]
  rect 1.15x0.6 smd: 1(-1.3,0.95) 2(-1.3,0) 3(-1.3,-0.95) 4(1.3,-0.95) 5(1.3,0.95)
  silkscreen extent -1.88,-1.5 0.38,1.5, body extent -1.43,-1.5 1.43,1.5, height 1.4
WE-PD_7345 [mm] "SMT Shielded Power Inductor, 2-leads, body 7.3x7.3mm"
  rect 1.6x2.2 smd: 1(-3.2,0) 2(3.2,0)
  Top Layer keep-out region: -3.65,-3.65 -3.65,-1.3 -2.2,-1.3 -2.2,1.3 -3.65,1.3 -3.65,3.65 3.65,3.65 3.65,1.3 2.2,1.3 2.2,-1.3 3.65,-1.3 3.65,-3.65
  silkscreen extent -4.62,-3.75 3.75,3.75, body extent -3.65,-3.65 3.65,3.65, height 3.91

## Part data
BT1: "Battery", Manufacturer_Name="Adam Tech", Mouser Part Number=737-BH-25F-1, Arrow Part Number=BH-25F-1, Arrow Price/Stock=https://www.arrow.com/en/products/bh-25f-1/adam-tech?utm_currency=USD&region=europe, Datasheet Link=https://app.adam-tech.com/products/download/data_sheet/196966/bh-25f-1-data-sheet.pdf, Height=9.5mm, Manufacturer_Part_Number=BH-25F-1, Mouser Price/Stock=https://www.mouser.co.uk/ProductDetail/Adam-Tech/BH-25F-1?qs=HoCaDK9Nz5dcCnxRauSciw%3D%3D
C1 C5 C6 C7 C8 C16 C17 C18 C19 C20 C29 C30 C31 C32 C33 C34: library part CAP_0603, "Capacitor SMD 0603 / X7R / LOW ESR"
C2 C15: library part SC1C227M6L07KVR, "Capacitor Polarised / 220uF 16V /  / SC1C227M6L07KVR", Manufacturer_Name=SAMWHA, Datasheet Link=https://octopart.com/datasheet/sc1c227m6l07kvr-samwha-30812620, Height=8.1mm, Manufacturer_Part_Number=SC1C227M6L07KVR
C3: library part CAP_1206, "Capacitor SMD 1206 / 25V"
C4: library part CAP_0603, "Capacitor SMD 0603 / 25V"
C9 C24 C25: library part CAP_0603, "Capacitor SMD 0603"
C10: library part CMP-04424-000366-1, "100uF 6.3V  ±10% 1.7Ω 1210  SMD Tantalum Capacitor / TAJB107K006RNJ", Case Code (Imperial)=1210, Case Code (Metric)=3528, Dielectric Material=Tantalum, ESR (Equivalent Series Resistance)=1.7R, Leakage Current=6.3uA, Max Operating Temperature=125°C, Min Operating Temperature=-55°C, Package Quantity=1, Tolerance=10%, Voltage=6.3V, Capacitance=100uF, Case/Package=1210, Construction=Flat, Depth=2.8mm, Dissipation Factor=10%, Features="General Purpose", Height=1.9mm, Height - Seated (Max)=0.083inch, Lead Free="Lead Free", Length=3.5mm, Mount="Surface Mount", Packaging="Tape and Reel", Polarity=Polar, Radiation Hardening=No, REACH SVHC="No SVHC", RoHS Compliant=Yes, Series=TAJ, Termination=SMD/SMT, Voltage Rating=6.3V, Voltage Rating (DC)=6.3V, Width=2.8mm
C11 C12 C13 C14 C23 C28: library part CMP-13271-000587-1, "Cap Ceramic 100nF 10V X7R ±10% Pad SMD 0603 +125°C T/R", Case/Package=0603, Dielectric=X7R, Max Operating Temperature=125°C, Min Operating Temperature=-55°C, Package Quantity=10000, Tolerance=10%, Voltage=50V, Capacitance=100nF, Depth=0.8mm, Height=0.8mm, Lead Free="Lead Free", Length=1.6mm, Material=Ceramic, Mount="Surface Mount", Packaging="Tape and Reel", Radiation Hardening=No, Thickness=0.035inch, Voltage Rating=50V, Voltage Rating (DC)=50V, Width=0.031inch
C21 C27: library part CMP-13271-000587-1, "Cap Ceramic 10uF 10V X7R ±10% Pad SMD 0603 +125°C T/R", Capacitance=100nF, Case/Package=0603, Dielectric=X7R, Max Operating Temperature=125°C, Min Operating Temperature=-55°C, Package Quantity=10000, Tolerance=10%, Voltage=50V, Depth=0.8mm, Height=0.8mm, Lead Free="Lead Free", Length=1.6mm, Material=Ceramic, Mount="Surface Mount", Packaging="Tape and Reel", Radiation Hardening=No, Thickness=0.035inch, Voltage Rating=50V, Voltage Rating (DC)=50V, Width=0.031inch
C22: library part CMP-13271-000587-1, "Cap Ceramic 1uF 10V X7R ±10% Pad SMD 0603 +125°C T/R", Capacitance=100nF, Case/Package=0603, Dielectric=X7R, Max Operating Temperature=125°C, Min Operating Temperature=-55°C, Package Quantity=10000, Tolerance=10%, Voltage=50V, Depth=0.8mm, Height=0.8mm, Lead Free="Lead Free", Length=1.6mm, Material=Ceramic, Mount="Surface Mount", Packaging="Tape and Reel", Radiation Hardening=No, Thickness=0.035inch, Voltage Rating=50V, Voltage Rating (DC)=50V, Width=0.031inch
C26: library part TAJB107M010RNJ, "Kyocera AVX / TAJB107M010RNJ", Manufacturer_Name="Kyocera AVX", Mouser Part Number=581-TAJB107M010R, Arrow Part Number=TAJB107M010RNJ, Arrow Price/Stock=https://www.arrow.com/en/products/tajb107m010rnj/avx?utm_currency=USD&region=europe, Datasheet Link=http://datasheets.avx.com/TAJ.pdf, Height=2.1mm, Manufacturer_Part_Number=TAJB107M010RNJ, Mouser Price/Stock=https://www.mouser.co.uk/ProductDetail/KYOCERA-AVX/TAJB107M010RNJ?qs=fdqkYiOtZpcLl77pdaUmPA%3D%3D
C35 C36: library part CMP-13271-000587-1, "Cap Ceramic 22pF 25V SMD 0603", Case/Package=0603, Dielectric=X7R, Max Operating Temperature=125°C, Min Operating Temperature=-55°C, Package Quantity=10000, Tolerance=10%, Voltage=50V, Capacitance=22pF, Depth=0.8mm, Height=0.8mm, Lead Free="Lead Free", Length=1.6mm, Material=Ceramic, Mount="Surface Mount", Packaging="Tape and Reel", Radiation Hardening=No, Thickness=0.035inch, Voltage Rating=50V, Voltage Rating (DC)=50V, Width=0.031inch
C37: library part CMP-13271-000587-1, "Cap Ceramic 2.2uF / SMD 0603", Capacitance=22pF, Case/Package=0603, Dielectric=X7R, Max Operating Temperature=125°C, Min Operating Temperature=-55°C, Package Quantity=10000, Tolerance=10%, Voltage=50V, Depth=0.8mm, Height=0.8mm, Lead Free="Lead Free", Length=1.6mm, Material=Ceramic, Mount="Surface Mount", Packaging="Tape and Reel", Radiation Hardening=No, Thickness=0.035inch, Voltage Rating=50V, Voltage Rating (DC)=50V, Width=0.031inch
D1 D6: library part CMP-0303-00003-3, "DIODE SCHOTTKY 40V 1A SOD123", Average Rectified Current=1A, Capacitance=110pF, Case/Package=SOD-123-2, Forward Voltage=450mV, Max Forward Surge Current (Ifsm)=25A, Max Operating Temperature=125°C, Max Power Dissipation=450mW, Max Repetitive Reverse Voltage (Vrrm)=40V, Min Operating Temperature=-65°C, Package Quantity=3000, Peak Reverse Current=50uA, Contact Plating=Tin, Current Rating=1A, Element Configuration=Single, Forward Current=1A, Height=1.25mm, Lead Free="Lead Free", Length=2.85mm, Max Reverse Voltage (DC)=40V, Number of Pins=2, Output Current=1A, Packaging="Tape and Reel", Peak Non-Repetitive Surge Current=25A, Polarity=Standard, Radiation Hardening=No, REACH SVHC="No SVHC", Termination=SMD/SMT, Voltage Rating (DC)=40V, Weight=0.000353oz, Width=1.7mm
D2: library part CMP-12188-000005-1, "DIODE GEN PURP 200V 4A SMB", Forward Current=4A, Manufacturer=STMicroelectronics, Max Junction Temp=+175°C, Max Repetitive Reverse Voltage=200V, Max Surge Forward Current=70A, Package=SMB, Peak Reverse Current=3uA, Temperature="to +175°C", Automotive=No, Category=Diode, ComponentLink2Description=Datasheet, ComponentLink2URL=https://www.st.com/resource/en/datasheet/stth4r02.pdf, Device Class L1="Discrete Semiconductors", Device Class L2=Diodes, Device Class L3="Rectifier Diodes", Digikey Description="DIODE GEN PURP 200V 4A SMB", Height=2.65mm, Lead Free=Yes, Manufacturer Part Number=STTH4R02U, Mouser Description="Rectifiers RECTIFIER", Octopart=https://octopart.com/stth4r02u-stmicroelectronics-324581, RoHS=TRUE, Standoff Height=0.05mm, Temperature Range High=+175°C
D3: library part STS321150U751, "Diode ESD (Uni-directional) /  / SOD-323  / 16V 330pF", Manufacturer_Name=Eaton, Datasheet Link=https://www.eaton.com/content/dam/eaton/products/electronic-components/resources/data-sheet/eaton-sts321xxxuxxx-tvs-diode-esd-suppressor-data-sheet.pdf, Height=1mm, Manufacturer_Part_Number=STS321150U751
D4 D5 D7 D10 D11 D12 D13 D14: "Diode", Manufacturer_Name=SEMTECH, Mouser Part Number=947-SD05.TCT, Arrow Part Number=SD05.TCT, Arrow Price/Stock=https://www.arrow.com/en/products/sd05.tct/semtech?utm_currency=USD&region=nac, Datasheet Link=https://datasheet.datasheetarchive.com/originals/distributors/Datasheets-DGA26/1841681.pdf, Height=1.1mm, Manufacturer_Part_Number=SD05.TCT, Mouser Price/Stock=https://www.mouser.co.uk/ProductDetail/Semtech/SD05.TCT?qs=rBWM4%252BvDhIed78qt1y4o0Q%3D%3D
D8: "TVS Diode (Bi-directional)", Manufacturer_Name=LITTELFUSE, Mouser Part Number=576-P6SMB15CA, Arrow Part Number=P6SMB15CA, Arrow Price/Stock=https://www.arrow.com/en/products/p6smb15ca/littelfuse?region=nac, Datasheet Link=https://www.littelfuse.com/~/media/electronics/datasheets/tvs_diodes/littelfuse_tvs_diode_p6smb_datasheet.pdf.pdf, Height=2.61mm, Manufacturer_Part_Number=P6SMB15CA, Mouser Price/Stock=https://www.mouser.co.uk/ProductDetail/Littelfuse/P6SMB15CA?qs=MLCmBfHNlR44V7NRW6hWSw%3D%3D
D9: library part LED_0603_RED, "LED 0603 RED SMD / Model: OSR50603C1E"
D15: library part LED_0603_GREEN, "LED 0603 GREEN SMD / OSG50603C1E"
D16: library part LED_0603_YELLOW, "LED 0603 YELLOW SMD / OSY50603C1E-VV"
D17: library part LED_0603_BLUE, "LED 0603 BLUE SMD"
DISP1: "Connector", Manufacturer_Name="Amphenol Communications Solutions", Mouser Part Number=523-L77SDE09S1ACH4F, Datasheet Link=https://cdn.amphenol-cs.com/media/wysiwyg/files/drawing/l77sdxxxs1ach4f.pdf, Height=12.93mm, Manufacturer_Part_Number=L77SDE09S1ACH4F, Mouser Price/Stock=https://www.mouser.com/Search/Refine.aspx?Keyword=523-L77SDE09S1ACH4F
F1 F3 F4: library part 0685T3000-01, "Fuse 5A  / 63VAC/63VDC / 1206", Manufacturer_Name=BelFuse, Arrow Part Number=0685T3000-01, Arrow Price/Stock=https://www.arrow.com/en/products/0685t3000-01/bel-group, Datasheet Link=https://www.belfuse.com/resources/datasheets/circuitprotection/ds-cp-c1t-series.pdf, Height=0.83mm, Manufacturer_Part_Number=0685T3000-01
F2: "Fuse 3A  / 63VAC/63VDC / 1206", Manufacturer_Name=BelFuse, Arrow Part Number=0685T3000-01, Arrow Price/Stock=https://www.arrow.com/en/products/0685t3000-01/bel-group, Datasheet Link=https://www.belfuse.com/resources/datasheets/circuitprotection/ds-cp-c1t-series.pdf, Height=0.83mm, Manufacturer_Part_Number=0685T3000-01
FB1: library part CMP-0686-00557-7, "Chip Ferrite Bead, 0603 /  / For testing purpose", Case Code (Imperial)=0603, Case Code (Metric)=1608, Current Rating=2A, DC Resistance (DCR)=50mR, Frequency=100MHz, Max Operating Temperature=125°C, Min Operating Temperature=-55°C, Package Quantity=1, Tolerance=25%, Case/Package=0603, Core Material=Ferrite, DC Current=2A, Depth=0.8mm, Height=0.8mm, Impedance=120R, Lead Free="Lead Free", Length=1.6mm, Material=Steel, Max Current Rating=2A, Max DC Current=2A, Number of Circuits=1, Number of Lines=1, Number of Pins=2, Packaging="Tape and Reel", Radiation Hardening=No, REACH SVHC="No SVHC", RoHS Compliant=Yes, Shielding=Unshielded, Termination=SMD/SMT, Test Frequency=100MHz, Width=0.8mm
FB2 FB3: library part CMP-0686-00557-7, "Chip Ferrite Bead, 0603 / Z = 220, f = 100MHz", Case Code (Imperial)=0603, Case Code (Metric)=1608, Current Rating=2A, DC Resistance (DCR)=50mR, Frequency=100MHz, Max Operating Temperature=125°C, Min Operating Temperature=-55°C, Package Quantity=1, Tolerance=25%, Case/Package=0603, Core Material=Ferrite, DC Current=2A, Depth=0.8mm, Height=0.8mm, Impedance=120R, Lead Free="Lead Free", Length=1.6mm, Material=Steel, Max Current Rating=2A, Max DC Current=2A, Number of Circuits=1, Number of Lines=1, Number of Pins=2, Packaging="Tape and Reel", Radiation Hardening=No, REACH SVHC="No SVHC", RoHS Compliant=Yes, Shielding=Unshielded, Termination=SMD/SMT, Test Frequency=100MHz, Width=0.8mm
IC1: "Integrated Circuit", Manufacturer_Name=STMicroelectronics, Mouser Part Number=511-STM32F446RET6, Arrow Part Number=STM32F446RET6, Arrow Price/Stock=https://www.arrow.com/en/products/stm32f446ret6/stmicroelectronics?utm_currency=USD&region=nac, Datasheet Link=https://datasheet.datasheetarchive.com/originals/distributors/DKDS41/DSANUWW0028583.pdf, Height=1.6mm, Manufacturer_Part_Number=STM32F446RET6, Mouser Price/Stock=https://www.mouser.co.uk/ProductDetail/STMicroelectronics/STM32F446RET6?qs=Ok1pvOkw6%2FqpQsWf8F4wtQ%3D%3D
IC2 IC3 IC5: "Integrated Circuit", Manufacturer_Name="Diodes Incorporated", Mouser Part Number=621-ZXMS6004DN8-13, Arrow Part Number=ZXMS6004DN8-13, Arrow Price/Stock=https://www.arrow.com/en/products/zxms6004dn8-13/diodes-incorporated?region=nac, Datasheet Link=https://www.diodes.com//assets/Datasheets/ZXMS6004DN8.pdf, Height=1.75mm, Manufacturer_Part_Number=ZXMS6004DN8-13, Mouser Price/Stock=https://www.mouser.co.uk/ProductDetail/Diodes-Incorporated/ZXMS6004DN8-13?qs=W66WzN12R3YH%252BpRyFoT8Rg%3D%3D
IC4: "Integrated Circuit", Manufacturer_Name=Lite-On, Mouser Part Number=859-LTV-356T, Arrow Part Number=LTV-356T, Arrow Price/Stock=https://www.arrow.com/en/products/ltv-356t/lite-on-technology?region=nac, Datasheet Link=https://componentsearchengine.com/Datasheets/1/LTV-356T.pdf, Height=2.2mm, Manufacturer_Part_Number=LTV-356T, Mouser Price/Stock=https://www.mouser.co.uk/ProductDetail/LITEON/LTV-356T?qs=30I3lYpOJSWvIikXPmhOGQ%3D%3D
IC6: "Integrated Circuit", Manufacturer_Name="Diodes Incorporated", Mouser Part Number=621-AP22802BW5-7, Arrow Part Number=AP22802BW5-7, Arrow Price/Stock=https://www.arrow.com/en/products/ap22802bw5-7/diodes-incorporated?utm_currency=USD&region=asia, Datasheet Link=https://www.diodes.com//assets/Datasheets/products_inactive_data/AP22802.pdf, Height=1.4mm, Manufacturer_Part_Number=AP22802BW5-7, Mouser Price/Stock=https://www.mouser.co.uk/ProductDetail/Diodes-Incorporated/AP22802BW5-7?qs=4WD8WRWcnWvdREmNWulNnQ%3D%3D
K1 K2 K3 K4 K5 K6: library part CMP-03395-000123-1, "Electromechanical Relay 12VDC 254Ohm 40A SPDT (12.9x12x9.9)mm THT Power Relay", Ambient Temperature Range High=+105°C, Ambient Temperature Range Low=-40°C, Coil Power=567mW, Coil Resistance=254Ω, Coil Voltage=12V, Current Rating=30A, Manufacturer="TE Connectivity", Automotive=No, Category=Relay, Coil Type=Non-Latching, ComponentLink2Description=Datasheet, ComponentLink2URL=https://www.te.com/commerce/DocumentDelivery/DDEController?Action=showdoc&DocId=Data+Sheet%7FV23086-X0000-A001%7F0717%7Fpdf%7FEnglish%7FENG_DS_V23086-X0000-A001_0717.pdf%7F1393280-6, Device Class L1=Electromechanical, Device Class L2=Relays, Device Class L3="Power Relays", Footprint Url=https://www.te.com/commerce/DocumentDelivery/DDEController?Action=showdoc&DocId=Customer+Drawing%7FV23086-C1001-A403%7FE%7Fpdf%7FEnglish%7FENG_CD_V23086-C1001-A403_E.pdf%7F1393280-6, Height=10.1mm, Lead Free=Yes, Manufacturer Part Number=1393280-6, Number Of Contacts=1, Octopart=https://octopart.com/1393280-6-te+connectivity-45289632, Package=1393280-6, RoHS=TRUE, Standoff Height=0.3mm, Throw Configuration=SPDT
L1: library part CMP-0227-00155-2, "15uF, 2.7A  HPI0630-150", Ambient Temperature Range High=85°C, Ambient Temperature Range Low=-40°C, Current Rating=2.7A, DC Resistance (DCR)=110mΩ, Inductance=15µH, Max Operating Temperature=125°C, Self Resonant Frequency=9.5MHz, Tolerance=20%, Depth=7.3mm, Height=4.5mm, Length=7.3mm, Max DC Current=2.7A, Min Operating Temperature=-40°C, NexarPartId=31136509, Number of Pins=2, Packaging="Tape & Reel", RoHS=Compliant, Shielding=Shielded, Width=7.3mm
PS1: "Power Supply", Manufacturer_Name="Texas Instruments", Mouser Part Number=595-TPS25942ARVCT, Arrow Part Number=TPS25942ARVCT, Arrow Price/Stock=https://www.arrow.com/en/products/tps25942arvct/texas-instruments?utm_currency=USD&region=nac, Datasheet Link=https://www.arrow.com/en/products/tps25942arvct/texas-instruments, Height=0.8mm, Manufacturer_Part_Number=TPS25942ARVCT, Mouser Price/Stock=https://www.mouser.co.uk/ProductDetail/Texas-Instruments/TPS25942ARVCT?qs=1MXlzafEN38%2FhNIOFl0fzQ%3D%3D
PS2: library part CMP-04918-000439-1, "IC REG BUCK ADJ 2A TSOT23-6", Case/Package=SOT-23-6, Max Input Voltage=28V, Max Operating Temperature=125°C, Min Input Voltage=4.5V, Min Operating Temperature=-40°C, Min Output Voltage=596mV, Output Current=2A, Quiescent Current=40uA, Switching Frequency=500kHz, ComponentLink1Description=datasheet, ComponentLink1URL=https://www.ti.com/lit/ds/symlink/tps54202.pdf, Lead Free="Lead Free", Max Output Voltage=28V, Mount="Surface Mount", Number of Outputs=1, Output Configuration=Positive, Output Type=Adjustable, Packaging="Tape and Reel", RoHS Compliant=Yes, Synchronous Rectifier=Yes
PWR_IO1: library part CMP-1502-00539-2, Color=White, Contact Resistance=10mΩ, Current Rating=6A, Insulation Resistance=1GΩ, Max Operating Temperature=105°C, Min Operating Temperature=-40°C, Operating Supply Voltage=600V, Connector Type="Male Pin, Socket", Contact Material=Copper, Contact Plating=Tin, Fastening Type=Ramp, Gender=Male, Height=12.8mm, Lead Pitch=4.2mm, Length=51.6mm, Mount="Through Hole", NexarPartId=23024662, Number Of Contacts=24, Number of Pins=24, Number of Positions=24, Number of Rows=2, Pitch=4.2mm, REACH SVHC=Unknown, RoHS=Compliant, Row Spacing=4.191mm, Termination=Solder, Width=51.7mm
Q1: library part CMP-2000-04929-2, "MOSFET N-CH 60V 115MA SOT23-3", Case/Package=SOT-23, Continuous Drain Current (ID)=115mA, Drain to Source Breakdown Voltage=70V, Drain to Source Resistance=7.5R, Drain to Source Voltage (Vdss)=60V, Gate to Source Voltage (Vgs)=20V, Input Capacitance=50pF, Max Operating Temperature=150°C, Max Power Dissipation=300mW, Min Operating Temperature=-55°C, Package Quantity=3000, Power Dissipation=540mW, Threshold Voltage=2.5V, Contact Plating=Tin, Current Rating=115mA, Dual Supply Voltage=60V, Element Configuration=Single, Fall Time=5.6ns, Height=1mm, Lead Free="Lead Free", Length=2.9mm, Mount="Surface Mount", Nominal Vgs=2.5V, Number of Channels=1, Number of Elements=1, Number of Pins=3, On-State Resistance=7.5R, Packaging="Tape and Reel", Radiation Hardening=No, Rds On Max=7.5R, REACH SVHC="No SVHC", Rise Time=3ns, Termination=SMD/SMT, Turn-Off Delay Time=11ns, Turn-On Delay Time=7ns, Voltage=60V, Voltage Rating (DC)=60V, Weight=0.000282oz, Width=1.3mm
R1 R2 R3 R6 R7 R8 R9 R10 R11 R12 R13 R14 R15 R16 R17 R18 R19 R20 R21 R22 R23 R24 R25 R26 R27 R28 R29 R30 R31 R32 R33 R34 R35 R36 R37 R38 R39 R40 R41 R42 R43 R44 R45: library part RES_0603, "Resistor SMD 0603"
R4 R5: library part RES_0603, "Resistor SMD 0603 / Tolerance 1%"
RST1: library part CMP-1676-00001-5, "Male Header, Pitch 2.54 mm, 1 x 3 Position, Height 8.38 mm, Tail Length 3.18 mm, RoHS, Bulk", Colour=Black, Current Rating="4 A", Manufacturer=Molex, Max Operating Temperature="75 degC", Min Operating Temperature="0 degC", Package Quantity=1, Voltage Rating="250 V", ComponentLink1Description="Manufacturer URL", ComponentLink1URL=http://www.molex.com/, ComponentLink2Description=Datasheet, ComponentLink2URL=http://www.molex.com/pdm_docs/sd/022284033_sd.pdf, Contact Finish=Gold, Contact Material=Brass, Contact Plating=Gold, DatasheetVersion="Rev. G, 01/2012", Height="8.38 mm", Lead Pitch="0.1 inch", Length="7.62 mm", Mount="Through Hole", Mounting Technology="Through Hole", PackageDescription="Male Header, Pitch 2.54 mm, 1 x 3 Position, Height 8.38 mm, Tail Length 3.18 mm", PackageReference=22-28-4033, Packaging=Bulk, Pins=3, REACH SVHC=Unknown, RoHSCompliant=true, Rows=1
SWD1: library part CMP-2000-05031-1, "Male Header, Pitch 2.54 mm, 2 x 5 Position, Height 9.3 mm, Tail Length 2.79 mm, -55 to 105 degC, RoHS, Bulk", Current Rating=1A, Manufacturer=3M, Brand=3MElectronicSolutionsDivision, Contact Gender=Pin(Male), Contact Material=Brass, Contact Plating=Gold, Datasheet URL=http://datasheet.octopart.com/30310-6002HB-3M-datasheet-11537585.pdf, Datasheet Version=Apr-12, Factory Pack Quantity=1000, Housing Material=Polyester, Manufacturer URL=http://www.3m.com/, Mating Post Length=5.99mm, Mounting Angle=Straight, Mounting Style=StraightPin, Number of Positions=10Position, Number of Rows=2Row, Packaging=Tray, Pitch=2.54mm, Product=Headers, Product Category=Headers&WireHousings, RoHS=Details, Row Spacing=2.54mm, Series=303, Termination Post Length=2.79mm, Termination Style=ThroughHole, Type=Shrouded
U1 U2 U3 U4: library part CMP-0859-00033-4, "Single Schmitt-Trigger Buffer, DBV0005A, LARGE T&R", F @ Nom Voltage(Max)(Mhz)=150, Generic Part Number=SN74LVC1G17, ICC @ Nom Voltage(Max)(mA)=0.01, Manufacturer="Texas Instruments", Operating Temperature Range(C)="-40 to 125,-40 to 85", Rating=Catalog, tpd @ Nom Voltage(Max)(ns)=11,6.5,5.5,5, Voltage(Nom)(V)=1.8,2.5,3.3,5, 3-State Output=No, Bits(#)=1, DatasheetVersion=SCES351V, Input Type=CMOS/TTL, Logic=True, Output Drive (IOL/IOH)(Max)(mA)=32/-32, Output Type=CMOS, PackageReference=DBV0005A, Schmitt Trigger=Yes, Sub-Family="Non-Inverting Buffer/Driver", Technology Family=LVC, VCC(Max)(V)=5.5, VCC(Min)(V)=1.65
U5 U6: library part CMP-0384-00999-1, "Double Channel Rail-to-Rail Operational Amplifier, 3 MHz BW, 5 V/us SR, Industrial, 8-pin SOIC (R-8), Tube", Amplifiers Per Package=2, Generic Part Number=AD8532, Input Bias Current=5pA, Input Offset Voltage=25mV, Manufacturer="Analog Devices", Code_JEDEC=MS-012-AA, ComponentLink1Description="Manufacturer URL", ComponentLink1URL=http://www.analog.com/en/index.html, ComponentLink2Description=Datasheet, ComponentLink2URL=http://www.analog.com/static/imported-files/data_sheets/AD8531_8532_8534.pdf, ComponentLink3Description="Package Specification", ComponentLink3URL=http://www.analog.com/static/imported-files/packages/PKG_PDF/SOIC_Narrow%20(R)/R_8.pdf, DatasheetVersion="Rev. F", Iq/Amp=1.25mA, Mounting Technology="Surface Mount", PackageDescription="8-Pin Standard Small Outline Package, Body 3.9 x 4.9 mm, Pitch 1.27 mm", PackageReference=R-8, PackageVersion=060506-A, PartNumber=AD8532ARZ, Slew Rate=5V/us, Small Signal Bandwidth=3MHz, V Span Max=6V, V Span Min=3V
U7: library part CMP-0234-00055-6, "ACCEL 2-16G I2C/SPI 16LGA", Case/Package=LGA, Max Operating Temperature=85°C, Max Supply Voltage=3.6V, Min Operating Temperature=-40°C, Min Supply Voltage=1.71V, Operating Supply Current=11uA, Operating Supply Voltage=2.5V, Package Quantity=1, Axis="X, Y, Z", Bandwidth=5kHz, Contact Plating=Gold, Depth=3mm, Height=1mm, Interface=I2C, Lead Free="Lead Free", Length=3mm, Max Supply Voltage (DC)=3.6V, Min Supply Voltage (DC)=1.71V, Number of Pins=16, Output Type=Digital, Packaging="Tape and Reel", Radiation Hardening=No, REACH SVHC="No SVHC", Resolution=16b, RoHS Compliant=Yes, Sensor Type="3 Axis", Series=-, Width=3mm
Y1: library part CMP-2000-05035-2, "Crystal 32.768kHz ±20ppm (Tol) 12.5pF FUND 90kΩ 2-Pin Mini-CSMD T/R", Case/Package=CSMD, ESR (Equivalent Series Resistance)=90kR, Frequency=32.768kHz, Frequency Stability=20ppm, Insulation Resistance=500MR, Load Capacitance=12.5pF, Max Operating Temperature=85°C, Min Operating Temperature=-40°C, Operating Frequency="32.768 kHz", Package Quantity=3000, Depth=1.2mm, Frequency Tolerance=20ppm, Height=0.6mm, Lead Free="Lead Free", Length=2mm, Mount="Surface Mount", Number of Pins=2, Packaging="Tape and Reel", Radiation Hardening=No, REACH SVHC="No SVHC", RoHS Compliant=Yes, Series=ABS06, Series Resistance=90kR, Termination=SMD/SMT, Tolerance=20ppm, Width=1.2mm

## Via types
v1: diameter 0.457/0.457/0.457/0.457 (per signal layer), hole 0.305, Top Layer to Bottom Layer, tented both sides, 996 vias
v2: diameter 0.457, hole 0.305, Top Layer to Bottom Layer, tented both sides, 84 vias
v3: diameter 1.27, hole 0.711, Top Layer to Bottom Layer, tented both sides, 16 vias
v4: diameter 5, hole 3.1, Top Layer to Bottom Layer, 4 vias

## Nets (pads, with @x,y where several pads share a name; then routed paths per layer and width w, separated by ;. In a path a pad name is that pad's centre, name@x,y a point inside that pad or via, vN(x,y) a via of type N, cw(c..) or ccw(c..) an arc to the next point about the centre after c; other vN are vias at no path point)
3V3_MPU: C10.2 C11.1 C12.1 C13.1 C14.1 FB2.2 FB3.1 IC1.19 IC1.32 IC1.48 IC1.64 R37.1 R38.1 R41.1 | length 18.2
  Top Layer w0.254: IC1.48@39.862,61.462 39.881,61.481 41.381,61.481 v2(41.4,61.5) ; IC1.32@41.85,70.95 41.873,70.927 41.873,70.027 42.461,69.439 42.761,69.439 v2(42.8,69.4) ; v2@45.1,56.3 45.338,56.062 R38.1@46.2,56.062 ; IC1.19@48.35,70.95 48.373,70.927 48.373,69.627 v2(48.4,69.6) ; R37.1@48.5,56.062 49.383,56.062 49.645,55.8 v2(49.7,55.8) ; IC1.64@49.35,59.474 49.35,60.695 49.7,61.045 v2(49.7,61.1)
  Top Layer w0.762: C10.2@36.338,64.78 C10.2@36.376,64.742
  Bottom Layer w0.254: v2(41.4,61.5) 41.455,61.5 41.567,61.612 41.939,61.612 42.318,61.991 C13.1@42.318,62.064 ; C14.1@42.44,68.494 42.8,68.854 v2(42.8,69.4) ; v2(48.4,69.6) 48.4,69.545 48.521,69.424 48.521,68.864 C11.1@48.9,68.485 ; C12.1@48.8,61.912 48.873,61.912 49.685,61.1 v2(49.7,61.1) ; v2(50.5,59.6) 51.492,59.6 51.765,59.327 R41.1@51.765,59.288
  Bottom Layer w0.381: v2(51.4,70.4) 51.421,70.4 51.748,70.073 FB3.1@53.824,70.073
  other v2: 45,56.4
  other v3: 36.9,58 38.4,58.8
3V3_OLED: C25.2 C26.1 D11.1 DISP1.7 DISP1.8 IC6.1 R43.2 | length 21.2
  Top Layer w0.381: C26.1@66.9,79.7 D11.1@66.9,81.962 66.9,82.212 66.985,82.296 67.235,82.296 69.539,84.6 70.864,84.6 70.983,84.481 72.078,84.481 72.197,84.6 72.3,84.6 73.8,86.1 DISP1.7@73.8,86.6 ; DISP1.7@74.07,87.172 74.07,89.77 DISP1.8@74.1,89.8
  Top Layer w0.762: IC6.1@61.731,79.412 C25.2@63.7,79.412 ; R43.2@63.7,81.3 C25.2@63.7,79.412 ; C26.1@66.793,79.393 63.719,79.393 C25.2@63.7,79.412
ACC_MISO: IC1.10 U7.7 | length 21.9
  Top Layer w0.254: U7.7@36.213,76.225 37.233,76.225 37.413,76.405 37.413,76.458 37.7,76.745 v2(37.7,76.8) ; v2(47.3,66.51) 47.848,65.962 50.936,65.962 IC1.10@50.941,65.957
  Bottom Layer w0.254: v2(37.7,76.8) 40.9,76.8 47.437,70.263 47.437,66.895 47.339,66.797 47.339,66.549 v2(47.3,66.51)
ACC_MOSI: IC1.11 U7.6 | length 19.5
  Top Layer w0.254: U7.6@36.213,75.725 36.257,75.681 36.819,75.681 v2@37.1,75.4 ; v2(46.7,67.2) 46.739,67.239 46.987,67.239 46.995,67.247 48.341,67.247 49.125,66.462 50.827,66.462 IC1.11@50.833,66.456
  Bottom Layer w0.254: v2(37.161,75.347) 40.453,75.347 46.7,69.1 v2(46.7,67.2)
ACC_SCK: IC1.29 U7.4 | length 12.6
  Top Layer w0.254: v2(35.2,73.6) 35.2,73.655 35.488,73.943 U7.4@35.488,75 ; IC1.29@43.35,70.453 43.35,69.926 43.611,69.665 v2(43.611,69.61)
  Bottom Layer w0.254: v2(35.2,73.6) 36.946,71.854 41.446,71.854 42.509,70.791 42.509,70.732 43.611,69.63 v2(43.611,69.61)
ALARM_SIREN: IC1.40 IC5.4 | length 39.2
  Top Layer w0.254: IC5.4@27.612,99.317 28.05,99.317 29.1,98.267 v2(29.1,98.2) ; v2(38.4,67.2) 38.439,67.161 38.439,66.864 38.445,66.858 38.445,66.055 38.798,65.702 38.798,65.677 38.989,65.485 39.357,65.485 IC1.40@39.384,65.458
  Bottom Layer w0.254: v2(29.1,98.2) 30.2,97.1 30.2,76.1 38.4,67.9 v2(38.4,67.2)
AMB_SCL: D14.1 PWR_IO1.3 R32.2 | length 22.7
  Top Layer w0.254: R32.2@54.9,44.962 55.962,44.962 v2(56.6,45.6) ; D14.1@61.7,52.362 D14.1@61.825,52.237 ; v2(61.9,46.7) 62.9,47.7 62.9,51.162
  Top Layer w0.381: D14.1@61.7,52.112 62.612,51.2 62.9,51.2 68.088,51.2 PWR_IO1.3@70.3,53.412
  Bottom Layer w0.254: v2(56.6,45.6) 57.7,46.7 v2(61.9,46.7)
AMB_SDA: D13.1 PWR_IO1.2 R31.2 | length 38.8
  Top Layer w0.254: R31.2@45.6,43.363 45.7,43.363 46.663,42.4 59,42.4 60.6,44 60.6,55.212 61.6,56.212 D13.1@61.6,56.5
  Top Layer w0.381: D13.1@61.8,56.5 62.8,55.5 68.188,55.5 PWR_IO1.2@70.3,57.612
BLINK_BUTTON: D4.1 PWR_IO1.7 R10.2 | length 35.7
  Top Layer w0.254: R10.2@38.966,41.112 43.588,41.112 45.3,39.4 55.942,39.4 61.6,33.742 D4.1@61.6,33.6
  Top Layer w0.381: D4.1@61.8,33.4 62.8,34.4 66,34.4 68.212,36.612 PWR_IO1.7@70.3,36.612
BLINK_mod_con: K5.4 K6.4 PWR_IO1.10 | length 124.5
  Bottom Layer w0.762: K5.4@7.3,83.4 7.3,83.052 5.2,80.952 5.2,50.7 8.7,47.2 13.4,47.2 32.8,27.8 60.8,27.8 62.4,26.2 67.66,26.2 69.848,24.012 PWR_IO1.10@70.3,24.012 ; K6.4@7.7,96.8 7.688,96.8 6,95.112 6,88.859 7.71,87.149 K5.4@7.71,83.462
BLINKER_IN1_F: F3.2 PWR_IO1.4 | length 76.9
  Top Layer w0.762: F3.2@22.2,86.142 22.25,86.093 22.25,83.55 v3@22.3,83.5
  Bottom Layer w0.762: v3(22.3,83.4) 22.3,65.9 33.6,54.6 62.7,54.6 63.6,55.5 65.9,55.5 67.5,53.9 67.5,52.013 PWR_IO1.4@70.3,49.212
BLINKER_IN2_F: F4.2 PWR_IO1.5 | length 55.6
  Top Layer w0.762: F4.2@22.5,60.2 22.844,60.2 22.919,60.124 22.919,59.118 23.7,58.337 v3(23.7,58.2)
  Bottom Layer w0.762: v3(23.7,58.2) 30.5,51.4 65.42,51.4 67.55,49.269 67.55,48.15 70.3,45.4 PWR_IO1.5@70.3,45.012
BLINKERS_TOGETHER: IC1.42 IC3.2 | length 14.3
  Top Layer w0.254: IC3.2@27.613,70.177 28.968,70.177 29.045,70.1 v2(29.1,70.1) ; v2(37.8,64.9) 38.238,64.462 IC1.42@39.287,64.462
  Bottom Layer w0.254: v2(29.1,70.1) 34.6,64.6 36.023,64.6 36.323,64.9 v2(37.8,64.9)
BULB_OUT_F: F1.1 PWR_IO1.16 | length 43.1
  Top Layer w0.762: F1.1@22.4,50.242 22.715,50.242 23.56,49.397 24.403,49.397 v3@24.5,49.3
  Bottom Layer w0.762: v3(24.6,49.3) 24.737,49.3 25.237,49.8 63.688,49.8 64.276,49.212 PWR_IO1.16@64.8,49.212
FOTO: C19.1 D12.1 PWR_IO1.14 R28.1 R30.2 | length 39.6
  Top Layer w0.254: R28.1@52.85,30.012 52.85,30.112 54.427,31.689 54.427,31.739 54.588,31.9 R30.2@54.7,31.9 ; R30.2@54.8,32.012 54.812,32.001 C19.1@56.601,32.001 ; C19.1@57,32.089 58.8,33.889 v2(58.8,33.9) ; v2(58.9,43.9) 59.4,44.4 59.4,58.212 61.7,60.513 D12.1@61.7,60.763
  Top Layer w0.381: D12.1@61.7,60.7 61.7,60.513 64.601,57.612 PWR_IO1.14@64.8,57.612
  Bottom Layer w0.254: v2(58.8,33.9) 58.839,33.939 58.839,34.082 58.9,34.144 v2(58.9,43.9)
HAZARD_LIGHTS: IC1.41 IC5.2 | length 37.9
  Top Layer w0.254: IC5.2@27.612,96.777 28.05,96.777 29.1,95.727 v2(29.1,95.7) ; v2(37.2,67.6) 37.8,67 37.8,65.849 38.687,64.962 39.342,64.962 IC1.41@39.348,64.969
  Bottom Layer w0.254: v2(29.1,95.7) 29.1,74.797 32.821,71.075 33.725,71.075 v2(37.2,67.6)
HORN_OUT_F: D2.1 PWR_IO1.17 | length 112
  Top Layer w0.762: v3@22.7,104.6 24.355,106.255 25.854,106.255 D2.1@26.101,106.502
  Bottom Layer w0.762: v3@22.6,104.6 20.1,102.1 20.1,50.2 32,38.3 51.6,38.3 58.312,45.012 PWR_IO1.17@64.8,45.012
  other v3: 22.7,104.7
LED_OUT: K2.3 PWR_IO1.15 | length 66.5
  Top Layer w0.762: K2.3@8.1,51.7 8.1,51.863 11.637,55.4 23.5,55.4 25.7,57.6 25.7,59.286 24.8,60.186 v3(24.8,60.3)
  Bottom Layer w0.762: v3(24.8,60.3) 28.499,56.601 28.499,56.401 31.9,53 63.385,53 63.426,53.041 64.43,53.041 PWR_IO1.15@64.8,53.412